# Altium PCB Kasli_BP_Adapter.PCBDOC (part 1 of 3)
Units mil, origin at the board's own origin, x right, y up, seen from the top; angles counter-clockwise.
Board outline 2027.63 x 3937 mil, 4 copper layers (TopLayer, MP(G), MidLayer1, BottomLayer), stack 64.961 mil thick; 18 components, 82 nets, 256 pads, 42 vias.
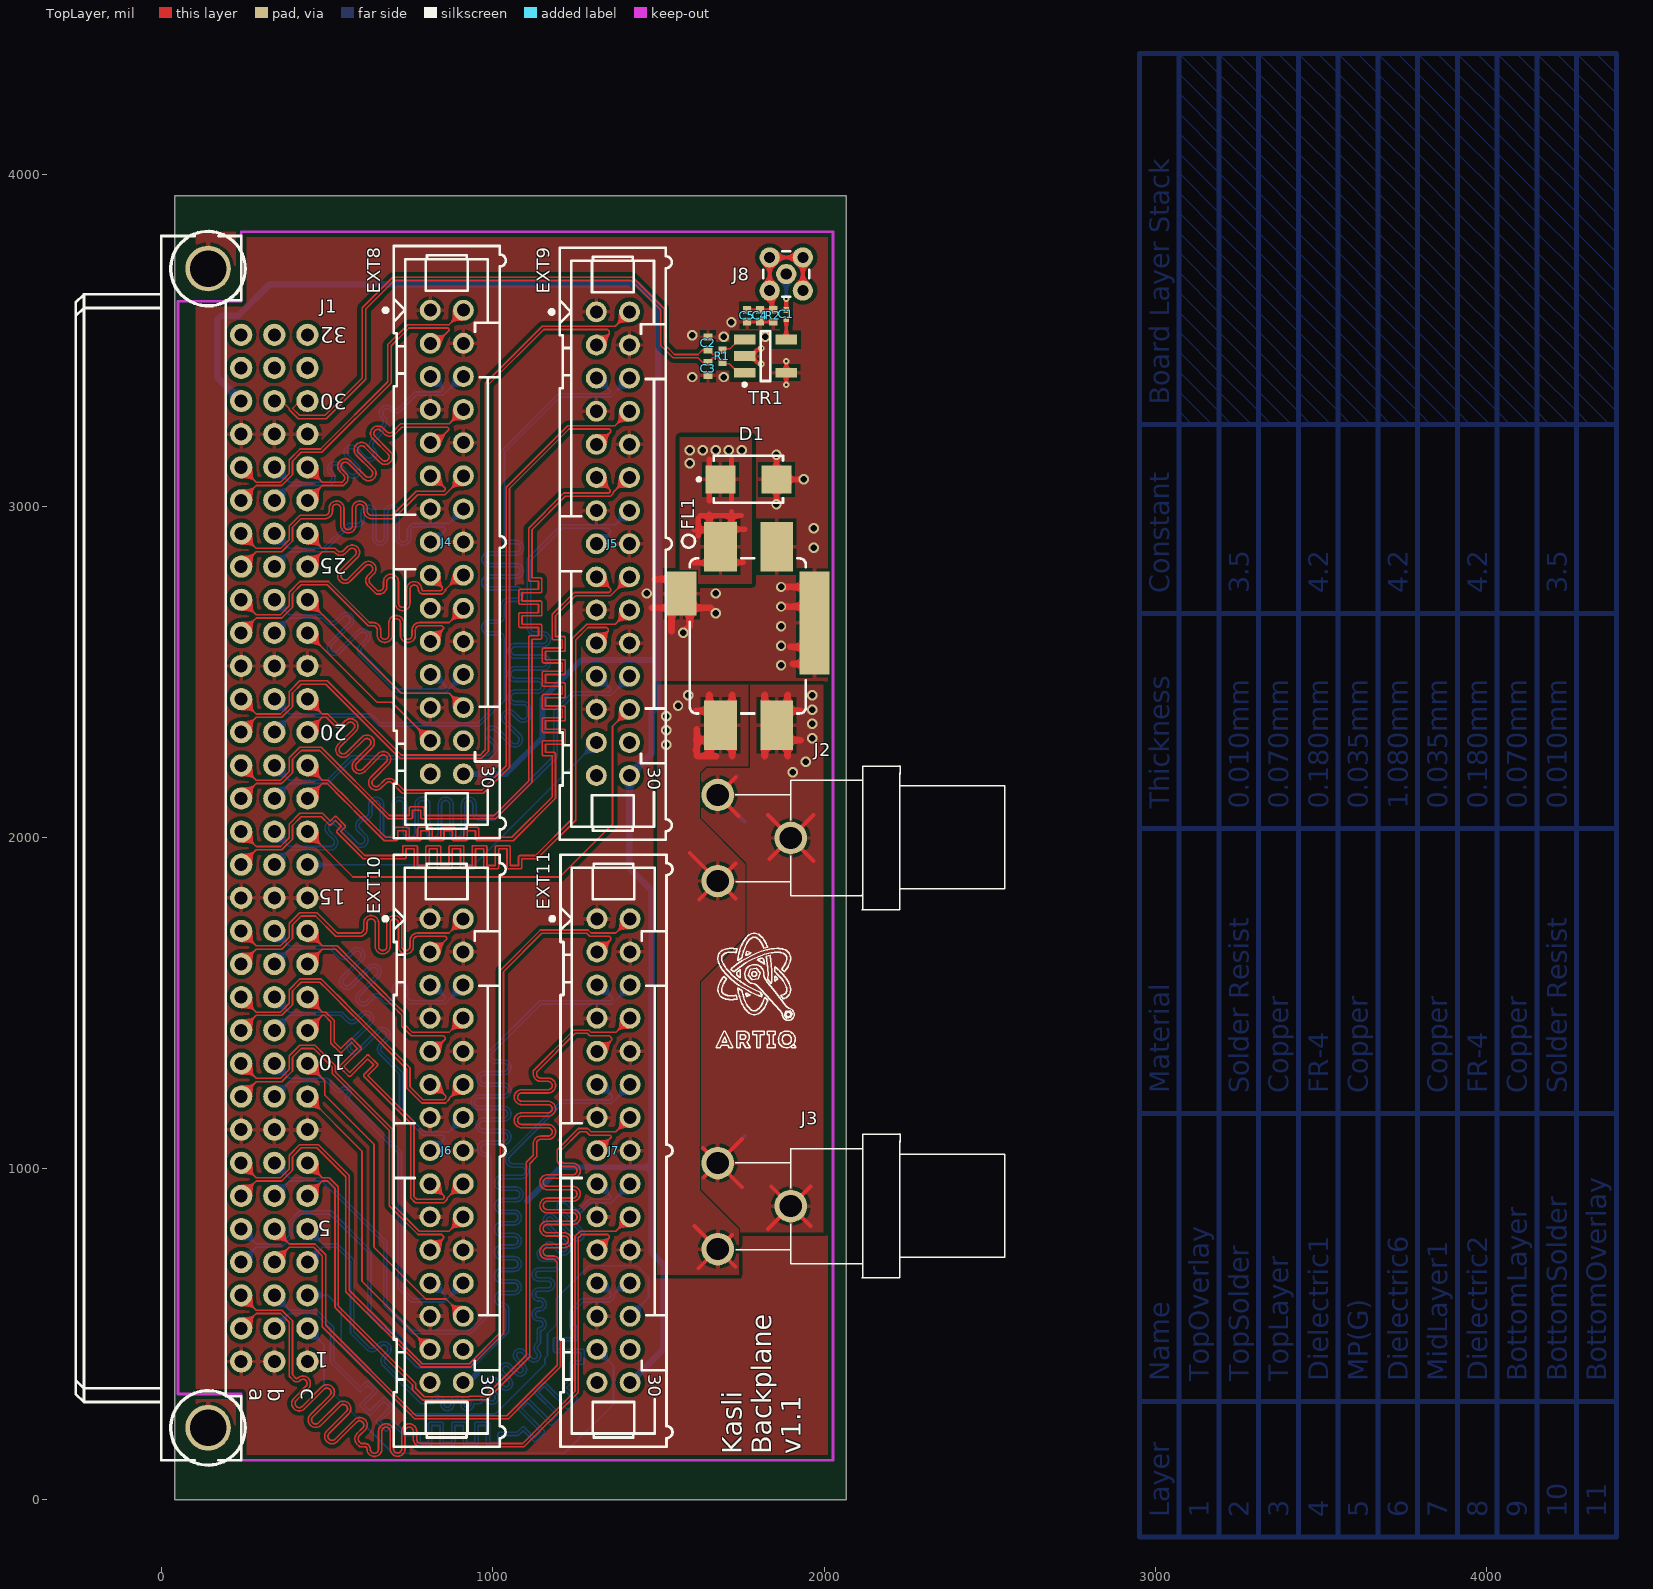
[diagram p0: TopLayer view]
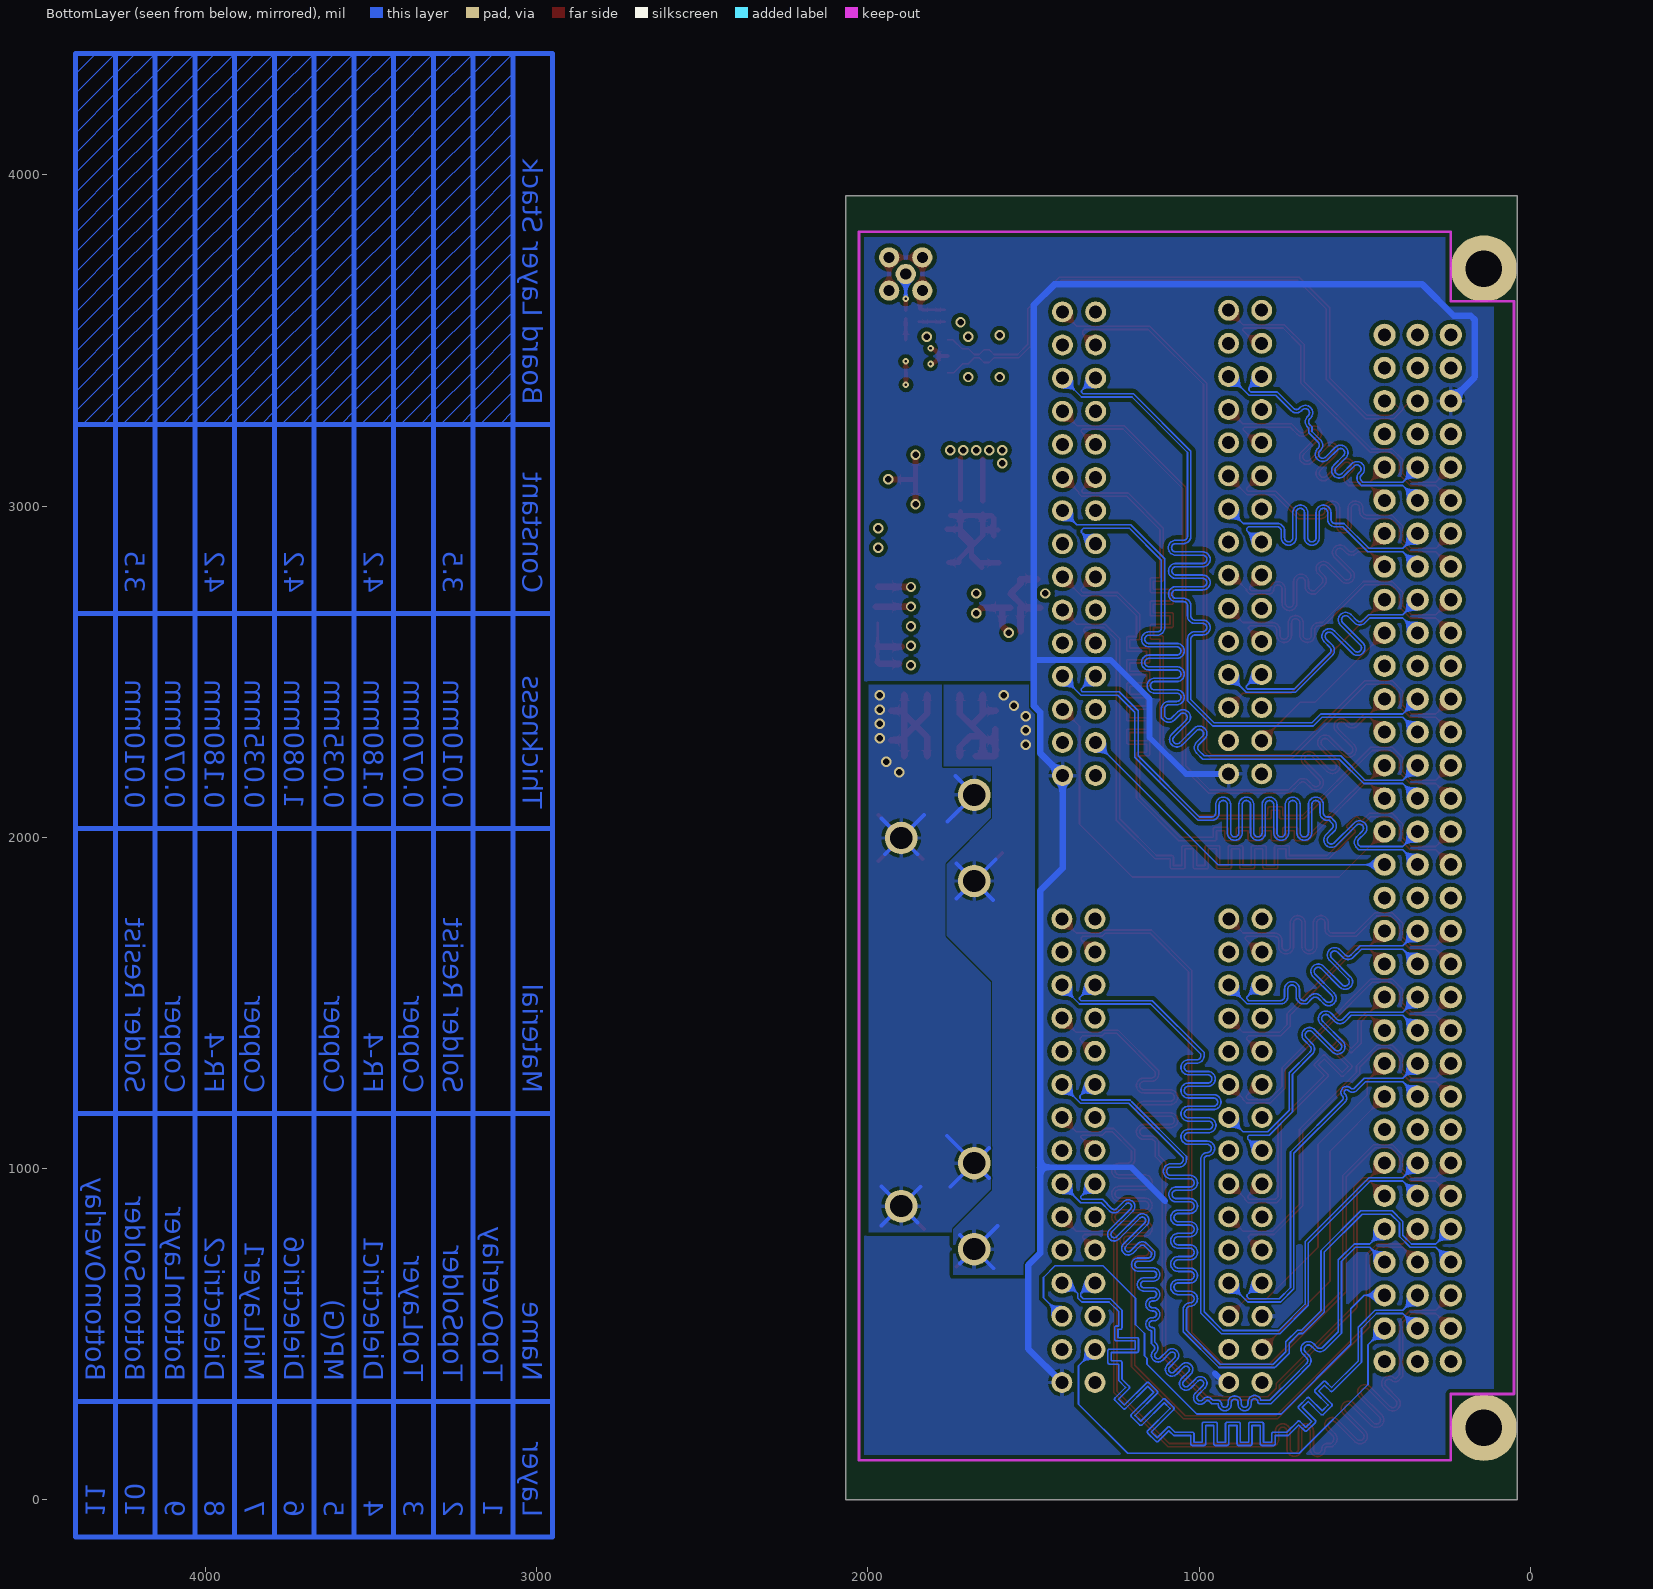
[diagram p1: BottomLayer view, seen from below]
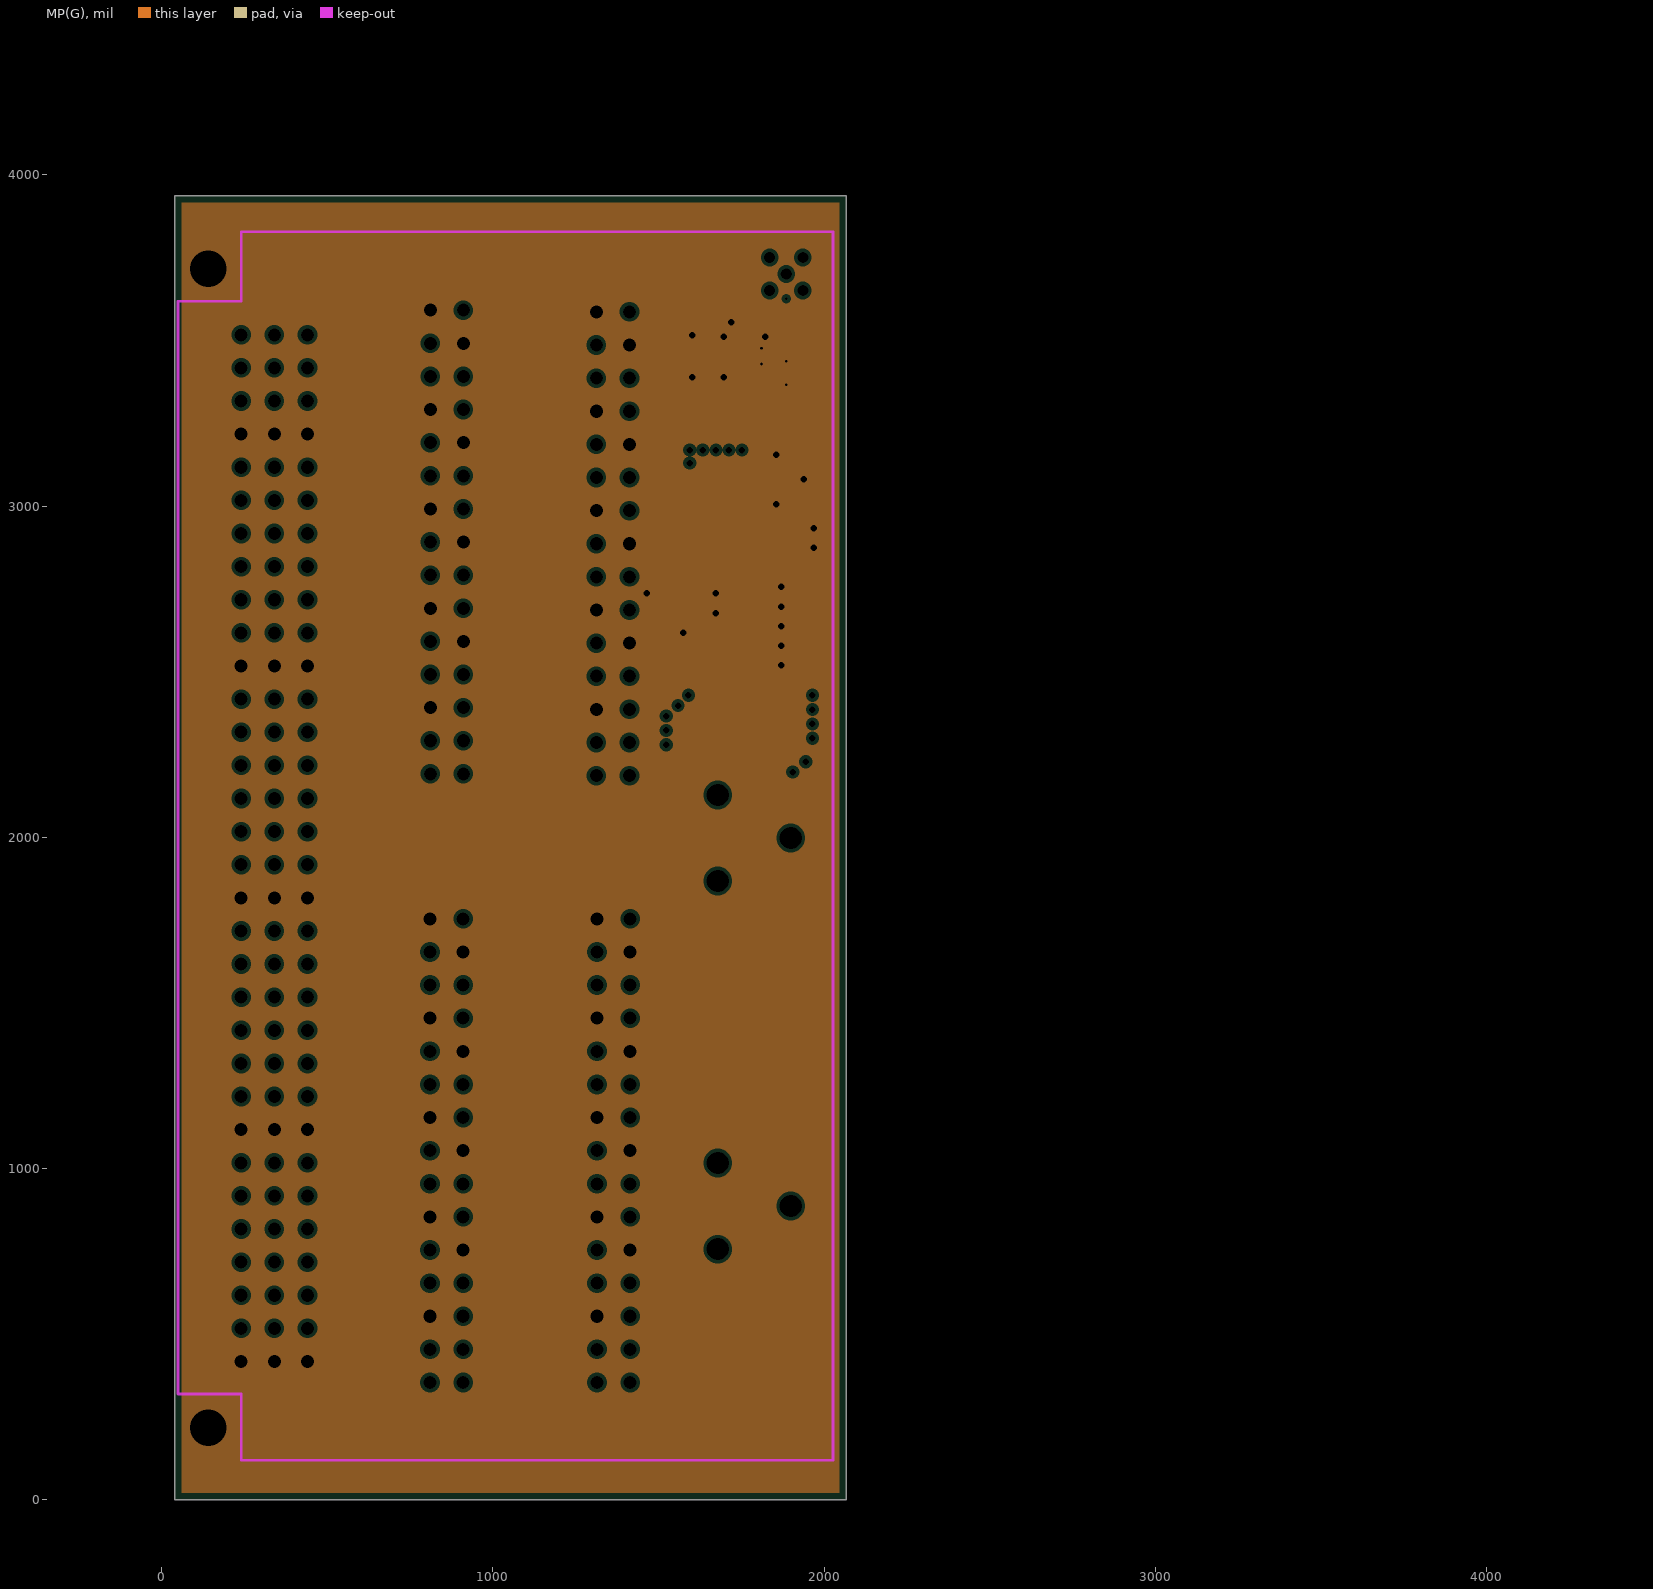
[diagram p2: MP(G), clearances drawn from the general rule]
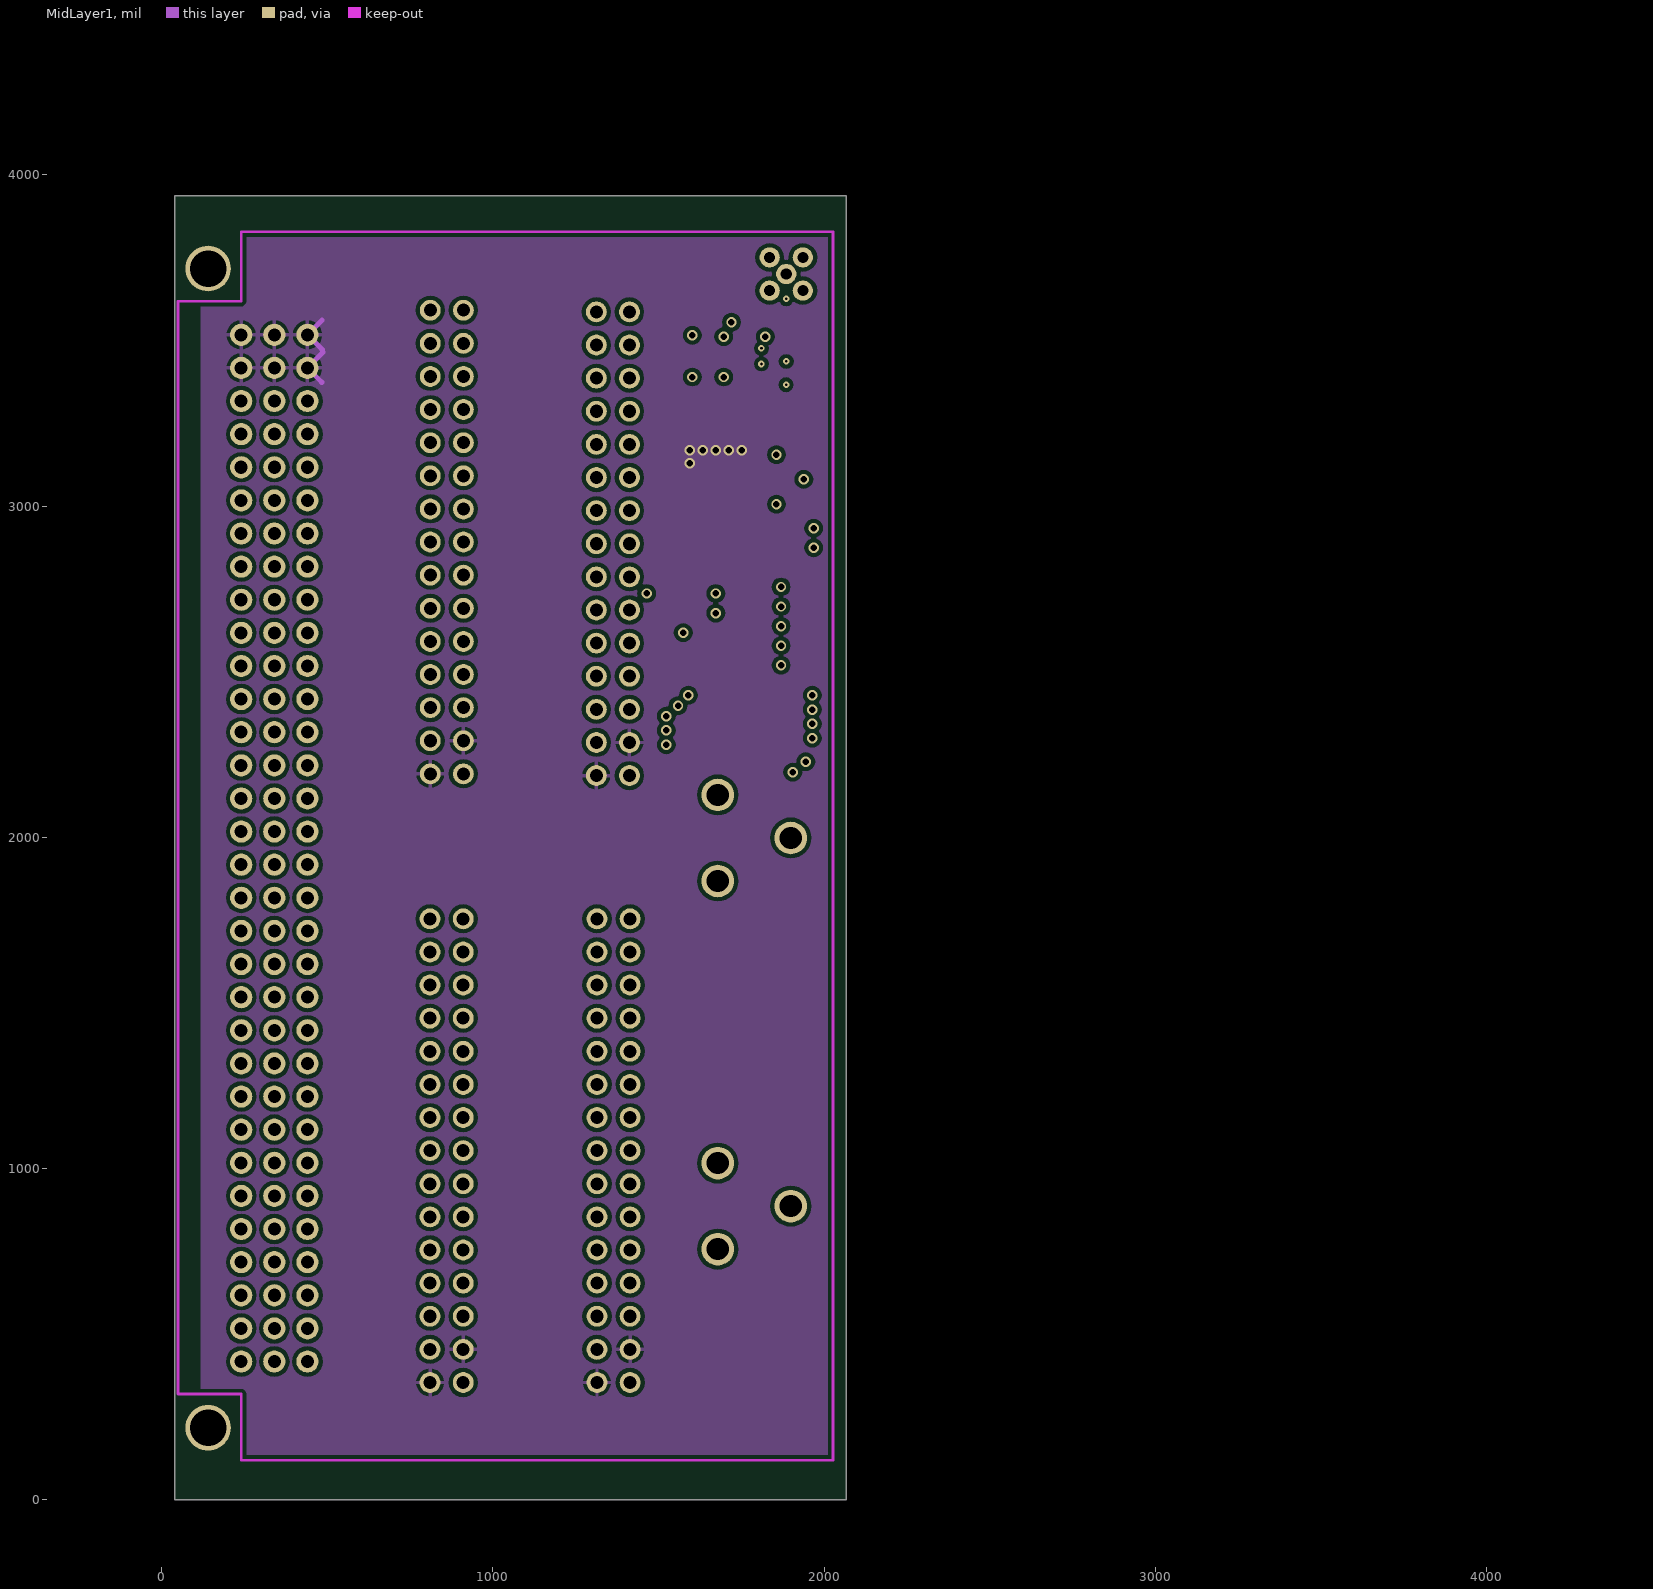
[diagram p3: MidLayer1]
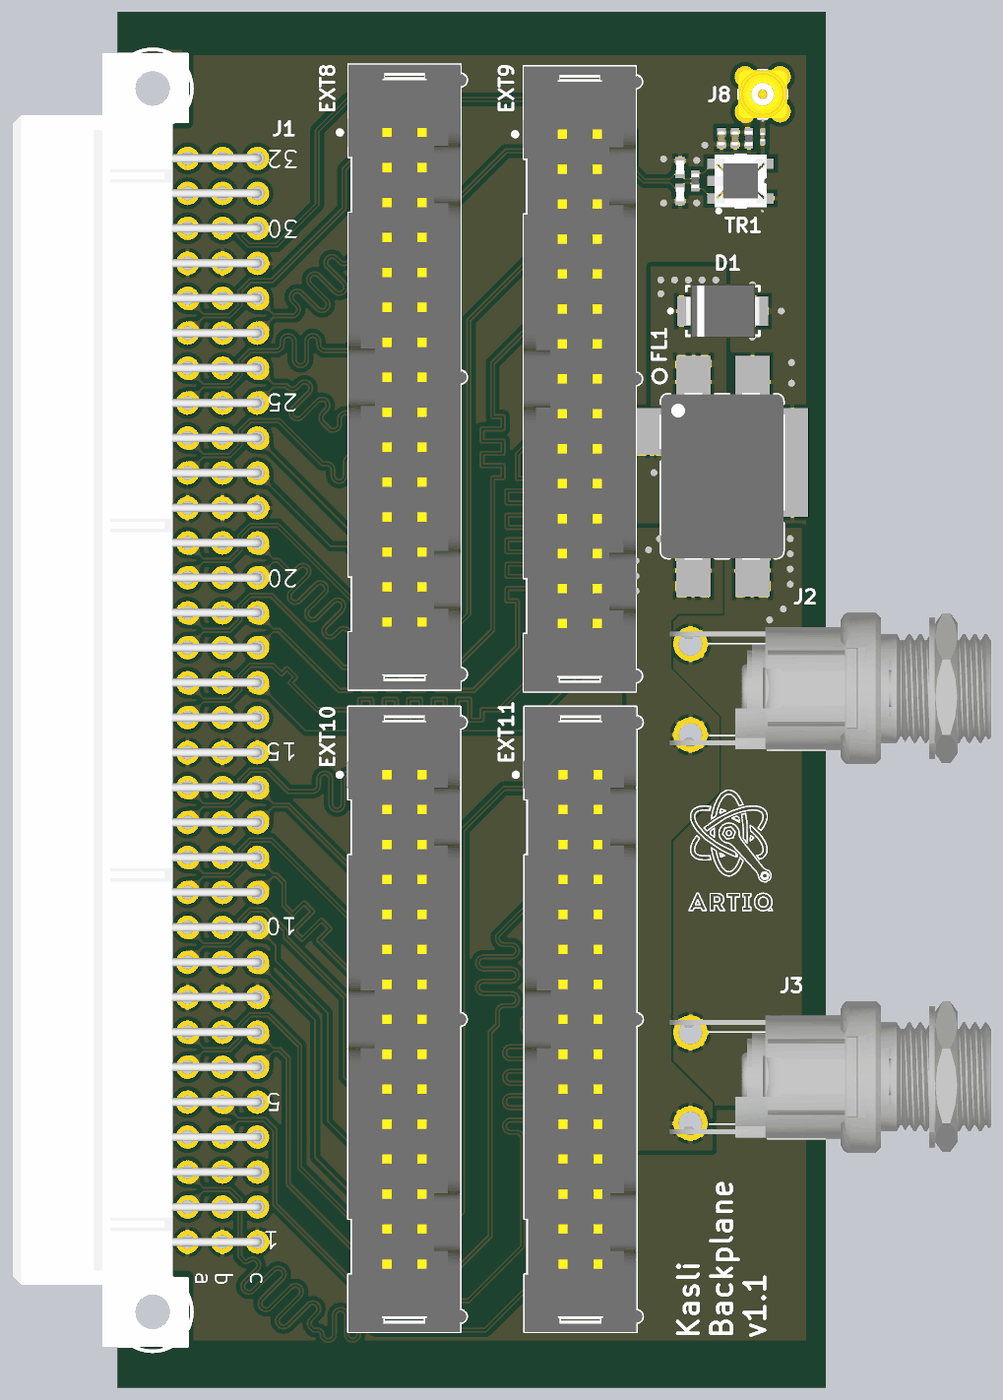
[diagram p5: 3D render of the assembled board from above, using the file's embedded part models]

## Layer stack, top to bottom
TopSolder: solder mask 0.4, Solder Resist, Dk 3.5
TopLayer: signal copper 2.7559
Dielectric1: prepreg 7.0866, FR-4, Dk 4.2
MP(G): plane copper 1.378, net GND
Dielectric6: core 42.5197, Dk 4.2
MidLayer1: signal copper 1.378
Dielectric2: prepreg 7.0866, FR-4, Dk 4.2
BottomLayer: signal copper 2.7559
BottomSolder: solder mask 0.4, Solder Resist, Dk 3.5

## Board outline
39.37,1913.39 39.37,3937 2067,3937 2067,0 39.37,0

## Design rules (kind name [scope] priority, off if disabled: settings)
AcuteAngle [All] p1: minimum=6.00000000000000E+0001 checktracksonly=FALSE
AssemblyTestPointUsage [All] p1 off:
AssemblyTestpoint [All] p1 off: testpointundercomponent=TRUE minsize=40 maxsize=100 preferedsize=60 minholesize=0 maxholesize=40 preferedholesize=32 testpointgrid=1 usegrid=TRUE gridtolerance=0.01 allowsidetop=TRUE allowsidebottom=TRUE
BoardOutlineClearance [All] p1: gap=15.75 ignorepadtopadclearanceinfootprint=FALSE
Clearance Clearance_poly_balancing [InNamedPolygon('BAL_TOP') or InNamedPolygon('BAL_BOT') or InNamedPolygon('ML1_BAL') or  InNamedPolygon('ML2_BAL')   or InNamedPolygon('GND_L01_P023') or InNamedPolygon('P12V0_L03_P024')  or InNamedPolygon('P3V3_L04_P028')] p1: gap=12 ignorepadtopadclearanceinfootprint=FALSE
Clearance Clearance_via [IsVia vs IsVia] p2: gap=5 ignorepadtopadclearanceinfootprint=FALSE
Clearance Clearance_inner [(OnLayer('MidLayer1') OR OnLayer('MidLayer2') OR OnLayer('SignalLayer1'))] p3: gap=5 ignorepadtopadclearanceinfootprint=FALSE
Clearance [OnLayer('TopLayer') or OnLayer('BottomLayer')] p4: gap=5 ignorepadtopadclearanceinfootprint=FALSE
ComponentClearance [All] p1 off: gap=10 collisioncheckmode=3 verticalgap=10 showdistances=FALSE
DiffPairsRouting DiffPairsRouting_100_Ohm [InDifferentialPairClass('Diff_100Ohm')] p1: maxlimit=9.84 minlimit=5 mostfreqgap=9.84 toplayer_maxgap=5 toplayer_prefgap=5 toplayer_minwidth=5 toplayer_maxwidth=5 toplayer_prefwidth=5 midlayer1_mingap=9.84 midlayer1_minwidth=5.91 midlayer1_maxwidth=5.91 midlayer1_prefwidth=5.91 bottomlayer_maxgap=5 bottomlayer_prefgap=5 bottomlayer_minwidth=5 bottomlayer_maxwidth=5 bottomlayer_prefwidth=5 maxuncoupledlength=393.7
DiffPairsRouting DiffPairsRouting_lvpecl [InDifferentialPairClass('LVPECL')] p2: maxlimit=9.84 minlimit=5 mostfreqgap=9.84 toplayer_maxgap=5 toplayer_prefgap=5 toplayer_minwidth=5 toplayer_maxwidth=5 toplayer_prefwidth=5 midlayer1_mingap=9.84 midlayer1_minwidth=5.91 midlayer1_maxwidth=5.91 midlayer1_prefwidth=5.91 bottomlayer_maxgap=5 bottomlayer_prefgap=5 bottomlayer_minwidth=5 bottomlayer_maxwidth=5 bottomlayer_prefwidth=5 maxuncoupledlength=393.7
DiffPairsRouting DiffPairsRouting_90_Ohm [InDifferentialPairClass('Diff_90Ohm')] p3: maxlimit=5.91 minlimit=4.92 mostfreqgap=5.91 toplayer_mingap=5.91 toplayer_minwidth=5.32 toplayer_maxwidth=5.32 toplayer_prefwidth=5.32 midlayer1_maxgap=4.92 midlayer1_prefgap=4.92 midlayer1_minwidth=12.28 midlayer1_maxwidth=12.28 midlayer1_prefwidth=12.28 bottomlayer_mingap=5.91 bottomlayer_minwidth=5.32 bottomlayer_maxwidth=5.32 bottomlayer_prefwidth=5.32 maxuncoupledlength=500
DiffPairsRouting [All] p4 off: maxlimit=10 minlimit=4.72 mostfreqgap=4.92 toplayer_minwidth=2.95 toplayer_maxwidth=19.68 toplayer_prefwidth=4.92 midlayer1_minwidth=2.95 midlayer1_maxwidth=19.68 midlayer1_prefwidth=4.92 bottomlayer_minwidth=2.95 bottomlayer_maxwidth=19.68 bottomlayer_prefwidth=4.92 maxuncoupledlength=118.11
FabricationTestPointUsage TestPointUsage [All] p1: valid=0 allowmultiple=FALSE
FabricationTestpoint Testpoint [All] p1: side=3 testpointundercomponent=TRUE minsize=40 maxsize=100 preferedsize=60 minholesize=20 maxholesize=40 preferedholesize=32 testpointgrid=1 allowsidetop=TRUE allowsidebottom=TRUE usegrid=TRUE gridtolerance=0.01
Height Height_1 [OnLayer('BottomLayer')] p1: minheight=0 maxheight=78.74 prefheight=39.37
Height [All] p2: minheight=0 maxheight=1000 prefheight=500
HoleSize [All] p1: absolutevalues=TRUE maxlimit=125.98 minlimit=5.91 maxpercent=80.000 minpercent=20.000
HoleToHoleClearance [All] p1: gap=5.91 allowstackedmicrovias=TRUE
MatchedLengths MatchedLengths_sfp [InDifferentialPairClass('SFP_RX_TX')] p1: tolerance=39.37 checknetsindiffpair=TRUE checkdiffpairvsdiffpair=FALSE checkxsignals=FALSE checkothers=FALSE
MatchedLengths MatchedLengths_diff_clocks [InxSignalClass('Differential clocks')] p2: tolerance=39.37 checknetsindiffpair=TRUE checkdiffpairvsdiffpair=FALSE checkxsignals=FALSE checkothers=FALSE
MatchedLengths MatchLengths_xSignals_clock_fanout [InxSignalClass('Clock fanout')] p3: tolerance=39.37 checknetsindiffpair=FALSE checkdiffpairvsdiffpair=TRUE checkxsignals=TRUE checkothers=TRUE
MatchedLengths MatchedLengths_ext11 [InDifferentialPairClass('EXT11')] p4: tolerance=39.37 checknetsindiffpair=FALSE checkdiffpairvsdiffpair=TRUE checkxsignals=TRUE checkothers=TRUE
MatchedLengths MatchedLengths_ext10 [InDifferentialPairClass('EXT10')] p5: tolerance=39.37 checknetsindiffpair=FALSE checkdiffpairvsdiffpair=TRUE checkxsignals=TRUE checkothers=TRUE
MatchedLengths MatchedLengths_ext9 [InDifferentialPairClass('EXT9')] p6: tolerance=39.37 checknetsindiffpair=FALSE checkdiffpairvsdiffpair=TRUE checkxsignals=TRUE checkothers=TRUE
MatchedLengths MatchedLengths_ext8 [InDifferentialPairClass('EXT8')] p7: tolerance=39.37 checknetsindiffpair=FALSE checkdiffpairvsdiffpair=TRUE checkxsignals=TRUE checkothers=TRUE
MatchedLengths [InDifferentialPairClass('All Differential Pairs')] p8: tolerance=196.85 checknetsindiffpair=TRUE checkdiffpairvsdiffpair=FALSE checkxsignals=FALSE checkothers=FALSE
MinimumAnnularRing MinimumAnnularRing_mid [OnLayer('MidLayer1') or OnLayer('MidLayer2') or OnLayer('MidLayer3') or OnLayer('MidLayer4')] p1: minimumring=5.91
MinimumAnnularRing MinimumAnnularRing_outer [OnLayer('TopLayer') or OnLayer('BottomLayer')] p2: minimumring=1.97
MinimumSolderMaskSliver [All] p1: minsoldermaskwidth=2.95
ParallelSegment [All] p1 off: limit=196.85 gap=10
PlaneClearance [All] p1: clearance=10
PlaneConnect [All] p1: pad.planeconnectstyle=Relief pad.reliefexpansion=7.87 pad.reliefentries=4 pad.reliefconductorwidth=10 pad.reliefairgap=10 via.planeconnectstyle=Direct via.reliefexpansion=7.87 via.reliefentries=4 via.reliefconductorwidth=10 via.reliefairgap=5.91
PolygonConnect PolygonConnect_pad [IsPad] p1: connectstyle=Relief reliefconductorwidth=11.81 reliefentries=4 polygonreliefangle="90 Angle" airgapwidth=10
PolygonConnect [All] p2: connectstyle=Direct reliefconductorwidth=10 reliefentries=4 polygonreliefangle="45 Angle" airgapwidth=10
RoomDefinition Connectors [InComponentClass('Connectors')] p1: confinementstyle=ConfineIn formatcopy=TRUE lockcomponents=FALSE outline -4000,-6000 -2000,-6000 -2000,-5000 -4000,-5000
RoomDefinition Kasli_BP_Adapter [InComponentClass('Kasli_BP_Adapter')] p2 off: confinementstyle=ConfineIn formatcopy=TRUE lockcomponents=FALSE outline 2093.19,392.06 2093.19,2207.94 2491.94,2207.94 2491.94,1927.94 5771.93,1927.94 5771.93,112.06 2561.76,112.06 2561.76,392.06
RoutingLayers RoutingLayers_1 [InNetClass('Diff_100Ohm')] p1: top layer_v5=TRUE mid layer 1_v5=FALSE bottom layer_v5=TRUE
RoutingLayers [All] p2: top layer_v5=TRUE mid layer 1_v5=TRUE bottom layer_v5=TRUE
RoutingTopology RoutingTopology_DDRAddressAndControls [InNetClass('DDR_AddressAndControls')] p1: topology=Daisy_Simple
RoutingTopology [All] p2: topology=Shortest
RoutingVias [All] p1: holewidth=5.91 width=13.78 viastyle="Through Hole" minholewidth=5.91 minwidth=13.78 maxholewidth=23.62 maxwidth=31.5
SMDEntry [All] p1 off: side=TRUE corner=TRUE anyangle=FALSE
SilkToSilkClearance [All] p1: silktosilkclearance=0
SilkToSolderMaskClearance SilkscreenOverComponentPads [IsPad] p1: minsilkscreentomaskgap=0 clearancetoexposedcopper=FALSE
SolderMaskExpansion [All] p1: expansion=1.97
StubLength [All] p1: limit=118.11
UnConnectedPin [All] p1 off:
ViasUnderSMD ViasUnderSMD_1 [(InNet('GND') AND (InComponent('IC1') or InComponent('IC2') or InComponent('IC3') or InComponent('IC14') or InComponent('IC15') or InComponent('IC18')))] p1: allowed=TRUE
ViasUnderSMD [All] p2: allowed=FALSE
Width Width_50Ohm [InNetClass('50Ohm')] p1: maxlimit=39.37 minlimit=11.81 preferedwidth=25.59 toplayer_maxwidth=11.81 toplayer_prefwidth=11.81 bottomlayer_maxwidth=11.81 bottomlayer_prefwidth=11.81 minimp=50.000000 maximp=50.000000 favimp=50.000000
Width [All] p2: maxlimit=78.74 minlimit=5 preferedwidth=5 minimp=50.000000 maximp=50.000000 favimp=50.000000
14 further rules are at their usual default settings.

## Classes and differential pairs
differential pair class EXT11: EXT11.LVDS_0 EXT11.LVDS_1 EXT11.LVDS_2 EXT11.LVDS_3 EXT11.LVDS_4 EXT11.LVDS_5 EXT11.LVDS_6 EXT11.LVDS_7
differential pair class EXT10: EXT10.LVDS_0 EXT10.LVDS_1 EXT10.LVDS_2 EXT10.LVDS_3 EXT10.LVDS_4 EXT10.LVDS_5 EXT10.LVDS_6 EXT10.LVDS_7
differential pair class EXT9: EXT9.LVDS_0 EXT9.LVDS_1 EXT9.LVDS_2 EXT9.LVDS_3 EXT9.LVDS_4 EXT9.LVDS_5 EXT9.LVDS_6 EXT9.LVDS_7
differential pair class EXT8: EXT8.LVDS_0 EXT8.LVDS_1 EXT8.LVDS_2 EXT8.LVDS_3 EXT8.LVDS_4 EXT8.LVDS_5 EXT8.LVDS_6 EXT8.LVDS_7
differential pair class LVPECL: CLK_EXT
differential pair class Diff_100Ohm: EXT8.LVDS_0 EXT8.LVDS_1 EXT8.LVDS_2 EXT8.LVDS_3 EXT8.LVDS_4 EXT8.LVDS_5 EXT8.LVDS_6 EXT8.LVDS_7 EXT9.LVDS_0 EXT9.LVDS_1 EXT9.LVDS_2 EXT9.LVDS_3 EXT9.LVDS_4 EXT9.LVDS_5 EXT9.LVDS_6 EXT9.LVDS_7 EXT10.LVDS_0 EXT10.LVDS_1 EXT10.LVDS_2 EXT10.LVDS_3 EXT10.LVDS_4 EXT10.LVDS_5 EXT10.LVDS_6 EXT10.LVDS_7 EXT11.LVDS_0 EXT11.LVDS_1 EXT11.LVDS_2 EXT11.LVDS_3 EXT11.LVDS_4 EXT11.LVDS_5 EXT11.LVDS_6 EXT11.LVDS_7
net class LVPECL: CLK_EXT_N CLK_EXT_P
net class Diff_100Ohm: EXT8.LVDS_0_N EXT8.LVDS_0_P EXT8.LVDS_1_N EXT8.LVDS_1_P EXT8.LVDS_2_N EXT8.LVDS_2_P EXT8.LVDS_3_N EXT8.LVDS_3_P EXT8.LVDS_4_N EXT8.LVDS_4_P EXT8.LVDS_5_N EXT8.LVDS_5_P EXT8.LVDS_6_N EXT8.LVDS_6_P EXT8.LVDS_7_N EXT8.LVDS_7_P EXT9.LVDS_0_N EXT9.LVDS_0_P EXT9.LVDS_1_N EXT9.LVDS_1_P EXT9.LVDS_2_N EXT9.LVDS_2_P EXT9.LVDS_3_N EXT9.LVDS_3_P EXT9.LVDS_4_N EXT9.LVDS_4_P EXT9.LVDS_5_N EXT9.LVDS_5_P EXT9.LVDS_6_N EXT9.LVDS_6_P EXT9.LVDS_7_N EXT9.LVDS_7_P EXT10.LVDS_0_N EXT10.LVDS_0_P EXT10.LVDS_1_N EXT10.LVDS_1_P EXT10.LVDS_2_N EXT10.LVDS_2_P EXT10.LVDS_3_N EXT10.LVDS_3_P EXT10.LVDS_4_N EXT10.LVDS_4_P EXT10.LVDS_5_N EXT10.LVDS_5_P EXT10.LVDS_6_N EXT10.LVDS_6_P EXT10.LVDS_7_N EXT10.LVDS_7_P EXT11.LVDS_0_N EXT11.LVDS_0_P EXT11.LVDS_1_N EXT11.LVDS_1_P EXT11.LVDS_2_N EXT11.LVDS_2_P EXT11.LVDS_3_N EXT11.LVDS_3_P EXT11.LVDS_4_N EXT11.LVDS_4_P EXT11.LVDS_5_N EXT11.LVDS_5_P EXT11.LVDS_6_N EXT11.LVDS_6_P EXT11.LVDS_7_N EXT11.LVDS_7_P
net class I2C_SDA_[11..8]: I2C_SDA_8 I2C_SDA_9 I2C_SDA_10 I2C_SDA_11
net class I2C_SCL_[11..8]: I2C_SCL_8 I2C_SCL_9 I2C_SCL_10 I2C_SCL_11
net class 50Ohm: NetC1_1 NetC1_2
component class Connectors: J2 J3
differential pair EXT11.LVDS_7: +EXT11.LVDS_7_P -EXT11.LVDS_7_N
differential pair EXT11.LVDS_6: +EXT11.LVDS_6_P -EXT11.LVDS_6_N
differential pair EXT11.LVDS_5: +EXT11.LVDS_5_P -EXT11.LVDS_5_N
differential pair EXT11.LVDS_4: +EXT11.LVDS_4_P -EXT11.LVDS_4_N
differential pair EXT11.LVDS_3: +EXT11.LVDS_3_P -EXT11.LVDS_3_N
differential pair EXT11.LVDS_2: +EXT11.LVDS_2_P -EXT11.LVDS_2_N
differential pair EXT11.LVDS_1: +EXT11.LVDS_1_P -EXT11.LVDS_1_N
differential pair EXT11.LVDS_0: +EXT11.LVDS_0_P -EXT11.LVDS_0_N
differential pair EXT10.LVDS_7: +EXT10.LVDS_7_P -EXT10.LVDS_7_N
differential pair EXT10.LVDS_6: +EXT10.LVDS_6_P -EXT10.LVDS_6_N
differential pair EXT10.LVDS_5: +EXT10.LVDS_5_P -EXT10.LVDS_5_N
differential pair EXT10.LVDS_4: +EXT10.LVDS_4_P -EXT10.LVDS_4_N
differential pair EXT10.LVDS_3: +EXT10.LVDS_3_P -EXT10.LVDS_3_N
differential pair EXT10.LVDS_2: +EXT10.LVDS_2_P -EXT10.LVDS_2_N
differential pair EXT10.LVDS_1: +EXT10.LVDS_1_P -EXT10.LVDS_1_N
differential pair EXT10.LVDS_0: +EXT10.LVDS_0_P -EXT10.LVDS_0_N
differential pair EXT9.LVDS_7: +EXT9.LVDS_7_P -EXT9.LVDS_7_N
differential pair EXT9.LVDS_6: +EXT9.LVDS_6_P -EXT9.LVDS_6_N
differential pair EXT9.LVDS_5: +EXT9.LVDS_5_P -EXT9.LVDS_5_N
differential pair EXT9.LVDS_4: +EXT9.LVDS_4_P -EXT9.LVDS_4_N
differential pair EXT9.LVDS_3: +EXT9.LVDS_3_P -EXT9.LVDS_3_N
differential pair EXT9.LVDS_2: +EXT9.LVDS_2_P -EXT9.LVDS_2_N
differential pair EXT9.LVDS_1: +EXT9.LVDS_1_P -EXT9.LVDS_1_N
differential pair EXT9.LVDS_0: +EXT9.LVDS_0_P -EXT9.LVDS_0_N
differential pair EXT8.LVDS_7: +EXT8.LVDS_7_P -EXT8.LVDS_7_N
differential pair EXT8.LVDS_6: +EXT8.LVDS_6_P -EXT8.LVDS_6_N
differential pair EXT8.LVDS_5: +EXT8.LVDS_5_P -EXT8.LVDS_5_N
differential pair EXT8.LVDS_4: +EXT8.LVDS_4_P -EXT8.LVDS_4_N
differential pair EXT8.LVDS_3: +EXT8.LVDS_3_P -EXT8.LVDS_3_N
differential pair EXT8.LVDS_2: +EXT8.LVDS_2_P -EXT8.LVDS_2_N
differential pair EXT8.LVDS_1: +EXT8.LVDS_1_P -EXT8.LVDS_1_N
differential pair EXT8.LVDS_0: +EXT8.LVDS_0_P -EXT8.LVDS_0_N
differential pair CLK_EXT: +CLK_EXT_P -CLK_EXT_N

## Components (designator, comment, footprint, x,y, rotation, side; value= is the part's Value field where it differs from the comment)
C1 "100nF" CAPC0603X33N 1885.83,3578.74 r90 top
C2 "0.5pF" CAPC1005X50N 1649.61,3491.14 r270 top
C3 "0.5pF" CAPC1005X50N 1649.61,3414.37 r270 top
C4 "10nF" CAPC1005X55N 1807.09,3574.8 r90 top
C5 "10nF" CAPC1005X55N 1767.72,3574.8 r90 top
D1 "SMBJ12A" DIOM5336X265N 1771.65,3080.71 r0 top
FL1 "10A/50VDC" FIL_MURATA_BNX02 1770,2608 r90 top
J1 "DIN 41612 Type R" "HARTING_09 73 296 6801" 240.16,417.32 r180 top locked
J2 "Jack" SWITCHCRAFT_L712RA 1679.13,1868.11 r180 top locked
J3 "Jack" SWITCHCRAFT_L712RA 1679.13,756.56 r180 top locked
J4 "=Familly" 3M_N2530-6002RB 861.02,2891.53 r270 top locked
J5 "=Familly" 3M_N2530-6002RB 1362.4,2886.42 r270 top locked
J6 "=Familly" 3M_N2530-6002RB 860.43,1053.94 r270 top locked
J7 "=Familly" 3M_N2530-6002RB 1364.37,1053.94 r270 top locked
J8 "MMCX-J-P-H-ST-TH1" SAMTEC_MMCX-J-P-H-ST-TH1 1885.82,3700.79 r0 top
R1 "100" RESC1005X40N 1692.91,3452.76 r90 top
R2 "100k" RESC1005X40N 1846.46,3574.8 r90 top
TR1 "TC2-1TX+" XFMR_MINI-CIRCUITS_AT1521 1822.83,3452.76 r90 top

## Footprints (in the part's own frame and the unit in brackets; to place one, negate y for a bottom-side part, rotate by r counter-clockwise, add the part's x,y. Pads: shape width x height; smd on the part's side, far side on the other; paste and mask are expansions set on the pad)
3M_N2530-6002RB [mm] "30 Contacts - Straight .100\" x .100\" Low Profile Four-Wall Header"
  round 1.6 hole 1: 1(-17.78,-1.27) 2(-17.78,1.27) 3(-15.24,-1.27) 4(-15.24,1.27) 5(-12.7,-1.27) 6(-12.7,1.27) 7(-10.16,-1.27) 8(-10.16,1.27) 9(-7.62,-1.27) 10(-7.62,1.27) 11(-5.08,-1.27) 12(-5.08,1.27) 13(-2.54,-1.27) 14(-2.54,1.27) 15(0,-1.27) 16(0,1.27) 17(2.54,-1.27) 18(2.54,1.27) 19(5.08,-1.27) 20(5.08,1.27) 21(7.62,-1.27) 22(7.62,1.27) 23(10.16,-1.27) 24(10.16,1.27) 25(12.7,-1.27) 26(12.7,1.27) 27(15.24,-1.27) 28(15.24,1.27) 29(17.78,-1.27) 30(17.78,1.27)
  silkscreen extent -22.71,-4.85 22.71,4.52, body extent -22.71,-4.11 22.71,4.52, height 9.91
CAPC0603X33N [mm] "Chip Capacitor, Body 0.6x0.30mm, IPC Medium Density"
  rect 0.45x0.4 smd: 1(-0.35,0) 2(0.35,0)
  body extent -0.31,-0.16 0.32,0.17, height 0.33
CAPC1005X50N [mm] "Chip Capacitor, Body 1.0x0.55mm, IPC Medium Density"
  rect 0.57x0.68 smd: 1(-0.49,0) 2(0.49,0)
  body extent -0.5,-0.27 0.5,0.28, height 0.5
CAPC1005X55N [mm] "Chip Capacitor, Body 1.0x0.55mm, IPC Medium Density"
  rect 0.62x0.62 smd: 1(-0.45,0) 2(0.45,0)
  body extent -0.52,-0.27 0.53,0.28, height 0.55
DIOM5336X265N [mm] "DO-214-AA/SMB Diode, Molded Body; 5.34mm L X 3.625mm W X 2.65mm H, IPC Medium Density"
  rect 2.3x2.15 smd: 1(-2.15,0) 2(2.15,0)
  silkscreen extent -3.92,-1.8 2.65,1.8, body extent -2.7,-1.95 2.7,1.95, height 2.4
FIL_MURATA_BNX02 [mm] "Block Type EMIFIL LC Combined Type, BNX02* Series"
  rect 3.8x2.5 smd: 1(-6.85,2.1) 2(6.85,2.1) 3(-6.85,-2.2) 4(6.85,-2.2)
  rect 7.9x2.3 smd: 4(1,-5.1)
  rect 3.4x2.3 smd: 4(3.25,5.1)
  silkscreen extent -5.95,-4.45 7.77,5.05, body extent -6.05,-4.55 6.05,4.55, height 3.1
"HARTING_09 73 296 6801" [mm] "Connector; DIN 41612, Type R, Thru-Hole; Rows a+b+c, 96 Position; Right Angle"
  round 1.7 hole 1: a1(0,0) a2(0,-2.54) a3(0,-5.08) a4(0,-7.62) a5(0,-10.16) a6(0,-12.7) a7(0,-15.24) a8(0,-17.78) a9(0,-20.32) a10(0,-22.86) a11(0,-25.4) a12(0,-27.94) a13(0,-30.48) a14(0,-33.02) a15(0,-35.56) a16(0,-38.1) a17(0,-40.64) a18(0,-43.18) a19(0,-45.72) a20(0,-48.26) a21(0,-50.8) a22(0,-53.34) a23(0,-55.88) a24(0,-58.42) a25(0,-60.96) a26(0,-63.5) a27(0,-66.04) a28(0,-68.58) a29(0,-71.12) a30(0,-73.66) a31(0,-76.2) a32(0,-78.74) b1(-2.54,0) b2(-2.54,-2.54) b3(-2.54,-5.08) b4(-2.54,-7.62) b5(-2.54,-10.16) b6(-2.54,-12.7) b7(-2.54,-15.24) b8(-2.54,-17.78) b9(-2.54,-20.32) b10(-2.54,-22.86) b11(-2.54,-25.4) b12(-2.54,-27.94) b13(-2.54,-30.48) b14(-2.54,-33.02) b15(-2.54,-35.56) b16(-2.54,-38.1) b17(-2.54,-40.64) b18(-2.54,-43.18) b19(-2.54,-45.72) b20(-2.54,-48.26) b21(-2.54,-50.8) b22(-2.54,-53.34) b23(-2.54,-55.88) b24(-2.54,-58.42) b25(-2.54,-60.96) b26(-2.54,-63.5) b27(-2.54,-66.04) b28(-2.54,-68.58) b29(-2.54,-71.12) b30(-2.54,-73.66) b31(-2.54,-76.2) b32(-2.54,-78.74) c1(-5.08,0) c2(-5.08,-2.54) c3(-5.08,-5.08) c4(-5.08,-7.62) c5(-5.08,-10.16) c6(-5.08,-12.7) c7(-5.08,-15.24) c8(-5.08,-17.78) c9(-5.08,-20.32) c10(-5.08,-22.86) c11(-5.08,-25.4) c12(-5.08,-27.94) c13(-5.08,-30.48) c14(-5.08,-33.02) c15(-5.08,-35.56) c16(-5.08,-38.1) c17(-5.08,-40.64) c18(-5.08,-43.18) c19(-5.08,-45.72) c20(-5.08,-48.26) c21(-5.08,-50.8) c22(-5.08,-53.34) c23(-5.08,-55.88) c24(-5.08,-58.42) c25(-5.08,-60.96) c26(-5.08,-63.5) c27(-5.08,-66.04) c28(-5.08,-68.58) c29(-5.08,-71.12) c30(-5.08,-73.66) c31(-5.08,-76.2) c32(-5.08,-78.74)
  round 3.5 / inner round 3.5 / far side round 5.1 hole 2.8: MTG1(2.54,5.08) MTG2(2.54,-83.82)
  silkscreen extent 0.01,-86.32 12.69,7.58, body extent -5.38,-86.37 12.74,7.63, height 9.1
RESC1005X40N [mm] "Chip Resistor, EIA 0402, Metric 1005, Body 1.0x0.5mm, IPC Medium Density"
  rect 0.58x0.62 smd: 1(-0.47,0) 2(0.47,0)
  body extent -0.52,-0.27 0.53,0.28, height 0.4
SAMTEC_MMCX-J-P-H-ST-TH1 [mm] "Straight Through-hole 50 Ohm Micro Mini RF Jack, MMCX Serie"
  round 1.55 hole 0.85: 1(0,0) 2(-1.27,-1.27) 2(-1.27,1.27) 2(1.27,-1.27) 2(1.27,1.27)
  silkscreen extent -1.75,-1.75 1.75,1.75, body extent -1.75,-1.75 1.75,1.75, height 4.35
SWITCHCRAFT_L712RA [mm] "CONN PWR JACK 2.5X5.5MM SOLDER"
  round 2.5 hole 1.7: 1(-5.6,-3.3) 2(0,-6.6) 3(0,0)
  silkscreen extent -22,-8.84 -1.32,2.21, body extent -21.84,-8.89 1.51,2.14, height 13.9
XFMR_MINI-CIRCUITS_AT1521 [mm] "MINI-CIRCUITS RF Transformer, Case AT1521, Body 3.81X3.81mm"
  rect 0.76x1.65 smd: 1(-1.27,1.59) 2(0,1.59) 3(1.27,1.59) 4(1.27,-1.59) 6(-1.27,-1.59)
  silkscreen extent -2.3,-0.37 1.9,1.72, body extent -1.9,-1.9 1.91,1.91, height 4.06

## Part data
C1: library part CC0201_100NF_6.3V_10%_X5R, "Non-polarised capacitor", Case=0201, Manufacturer=GENERIC, Manufacturer1 ComponentHeight=0.33mm, Manufacturer1 Example=AVX, Manufacturer1 Part Number=02016D104KAT2A, Tolerance=±10%, Voltage=6.3V, Author="CERN DEM JLC", Component Type=Standard, CreateDate=2007-12-03, HelpURL=\\cern.ch\dfs\Applications\Altium\Datasheets\CC0201_X5R_AVX.pdf, LatestRevisionDate=2007-12-03, Manufacturer Part Number=CC0201_100NF_6.3V_10%_X5R, Mounted=Yes, Part Description="SMD Multilayer Chip Ceramic Capacitor", Part Number=CC0201_100NF_6.3V_10%_X5R, Pin Count=2, Sense=No, SMD=Yes, Socket=No, Status="Not Recommended", TC=X5R
C2 C3: library part CC0402_0.5PF_25V_0.05PF_AVX_04023J0R5ABSTR, "Non-polarised capacitor", Case=0402, Manufacturer=AVX, Manufacturer Part Number=04023J0R5ABSTR, Tolerance=±0.05pF, Voltage=25V, Author="CERN DEM JLC", ComponentHeight=0.5mm, Component Type=Standard, CreateDate=2017-02-22, HelpURL=\\cern.ch\dfs\Applications\Altium\Datasheets\CC0402_AVX_ACCU-P.pdf, LatestRevisionDate=2017-02-22, Mounted=Yes, Part Description="Thin-Film Chip Capacitors for RF Signal and Power Applications, Accu-P Series", Part Number=CC0402_0.5PF_25V_0.05PF_AVX_04023J0R5ABSTR, Pin Count=2, Sense=No, SMD=Yes, Socket=No, Status=None
C4 C5: library part CC0402_10NF_16V_10%_X7R, "Non-polarised capacitor", Case=0402, Manufacturer=GENERIC, Manufacturer1 ComponentHeight=0.55mm, Manufacturer1 Example=PHYCOMP, Manufacturer1 Part Number=223878715636, Tolerance=±10%, Voltage=16V, Author="CERN DEM JLC", Component Type=Standard, CreateDate=03.12.2007, HelpURL=\\cern.ch\dfs\Applications\Altium\Datasheets\CC0402_X7R_PHYCOMP.pdf, LatestRevisionDate=03.12.2007, Manufacturer Part Number=CC0402_10NF_16V_10%_X7R, Mounted=Yes, Part Description="SMD Multilayer Chip Ceramic Capacitor", Part Number=CC0402_10NF_16V_10%_X7R, Pin Count=2, Sense=No, SMD=Yes, Socket=No, Status="Not Recommended", TC=X7R
D1: "Zener Diode", Case=DO-214AA, Manufacturer="FAIRCHILD SEMICONDUCTOR", Power=600W, Voltage=12V, Author="CERN DEM JLC", Bonding=No, ComponentHeight=2.65mm, Component Type=Standard, CreateDate=10.04.2013, Device=SMBJ12A, HelpURL=\\cern.ch\dfs\Applications\Altium\Datasheets\SMBJ.pdf, LatestRevisionDate=10.04.2013, Manufacturer Part Number=SMBJ12A, Mounted=Yes, PackageDescription="DO-214-AA/SMB Diode, Molded Body; 5.34mm L X 3.625mm W X 2.65mm H, IPC Medium Density", Part Description="Uni-Directional Transient Voltage Suppressor Diode", Part Number=SMBJ12A, Pin Count=2, PressFit=No, Sense=No, SMD=Yes, Socket=No
FL1: library part FIL_MURATA_BNX022-01L, "Block Type EMIFIL (LC Combined)", Manufacturer=MURATA, Manufacturer Part Number=BNX022-01L, Resistance=0.5R, Author="CERN DEM JLC", ComponentHeight=3.3mm, Component Type=Standard, CreateDate=10.10.2012, HelpURL=\\cern.ch\dfs\Applications\Altium\Datasheets\FIL_MURATA_BNX022-01L.pdf, LatestRevisionDate=10.10.2012, Mounted=Yes, Part Description="Block Type EMIFIL (LC Combined) SMD Type, BNX02* Series", Part Number=FIL_MURATA_BNX022-01L, Pin Count=2, Sense=No, SMD=Yes, Socket=No, Status=None
J1: library part "HARTING_09 73 296 6801", "Connector 96abc Female (3x32)", Manufacturer=HARTING, Manufacturer Part Number="09 73 296 6801", Author="CERN DEM JLC", ComponentHeight=9.5mm, Component Type=Standard, CreateDate=22.07.2008, Family="DIN 41612 Type R", HelpURL="\\cern.ch\dfs\Applications\Altium\Datasheets\HARTING_09 73 296 6801.pdf", LatestRevisionDate=22.07.2008, Mounted=Yes, Part Description="DIN 41612, Type R, 96 Position, Rows a+b+c, Performance level 2, Right Angle Female Connector, Lead 3.0 mm, Pitch 2.54mm", Part Number="HARTING_09 73 296 6801", Pin Count=98, PressFit=No, Sense=No, SMD=No, Socket=No, Status=None
J2 J3: "24V /3. 5A, 2.1mm Diameter Pin, SMD DC Power Supply Connector With  Break Contact", Manufacturer=SWITCHCRAFT, Manufacturer Part Number=712RA, Part Number=SWITCHCRAFT_712RA, Author=GK, ClassName=Connectors, ComponentHeight=11mm, Component Type=Standard, CreateDate=15.02.2011, Family=Jack, HelpURL=\\cern.ch\dfs\Applications\Altium\Datasheets\LUMBERG_161314.pdf, LatestRevisionDate=20.07.2011, Mounted=Yes, Part Description="12V/5A, 2.5mm Diameter Pin, THT DC Power Supply Connector With  Break Contact", Pin Count=3, PressFit=No, Sense=No, SMD=No, Socket=No, Status=None
J4 J5 J6 J7: library part 3M_N2530-6002RB, "Connector 30 Male", Manufacturer=3M, Manufacturer Part Number=N2530-6002RB, Author="CERN DEM JLC", ComponentHeight=10.03mm, Component Type=Standard, CreateDate=11.02.2009, Family="Header 30", HelpURL=\\cern.ch\dfs\Applications\Altium\Datasheets\3M_N2530-6002RB.pdf, LatestRevisionDate=11.08.2009, Mounted=Yes, Part Description="30 Contacts - Straight .100'' x .100'' Low Profile Four-Wall Header, 2500 Series", Part Number=3M_N2530-6002RB, Pin Count=30, PressFit=No, Sense=No, SMD=No, Socket=No, Status=None
J8: library part SAMTEC_MMCX-J-P-H-ST-TH1, Manufacturer=SAMTEC, Author="CERN DEM JLC", ComponentHeight=4.35mm, Component Type=Standard, CreateDate=05.12.2012, HelpURL=\\cern.ch\dfs\Applications\Altium\Datasheets\SAMTEC_MMCX-J-P-H-ST-TH1.pdf, LatestRevisionDate=05.12.2012, Manufacturer Part Number=MMCX-J-P-H-ST-TH1, Mounted=Yes, Part Description="Straight Through-hole 50 Ohm Micro Mini RF Jack, MMCX Series", Part Number=SAMTEC_MMCX-J-P-H-ST-TH1, Pin Count=2, PressFit=No, Sense=No, SMD=No, Socket=No, Status=None
R1: library part R0402_100R_1%_0.0625W_100PPM, "Resistor - 1%", Case=0402, Manufacturer=GENERIC, Manufacturer1 ComponentHeight=0.4mm, Manufacturer1 Example="YAGEO PHYCOMP", Manufacturer1 Part Number=232270671001L, Power=0.0625W, Tolerance=±1%, Author="CERN DEM JLC", Component Type=Standard, CreateDate=03.12.2007, HelpURL=\\cern.ch\dfs\Applications\Altium\Datasheets\R0402_Phycomp_RC0402.pdf, LatestRevisionDate=17.10.2012, Manufacturer Part Number=R0402_100R_1%_0.0625W_100PPM, Mounted=Yes, Part Description="General Purpose Thick Film Chip Resistor", Part Number=R0402_100R_1%_0.0625W_100PPM, Pin Count=2, PressFit=No, Sense=No, SMD=Yes, Socket=No, Status="Not Recommended", TC=±100ppm/°C
R2: library part R0402_100K_1%_0.0625W_100PPM, "Resistor - 1%", Case=0402, Manufacturer=GENERIC, Manufacturer1 ComponentHeight=0.4mm, Manufacturer1 Example="YAGEO PHYCOMP", Manufacturer1 Part Number=232270671004L, Power=0.0625W, Tolerance=±1%, Author="CERN DEM JLC", Component Type=Standard, CreateDate=03.12.2007, HelpURL=\\cern.ch\dfs\Applications\Altium\Datasheets\R0402_Phycomp_RC0402.pdf, LatestRevisionDate=17.10.2012, Manufacturer Part Number=R0402_100K_1%_0.0625W_100PPM, Mounted=Yes, Part Description="General Purpose Thick Film Chip Resistor", Part Number=R0402_100K_1%_0.0625W_100PPM, Pin Count=2, PressFit=No, Sense=No, SMD=Yes, Socket=No, Status="Not Recommended", TC=±100ppm/°C
TR1: library part XFMR_MINI-CIRCUITS_TC2-1TX+, "50 Ohm 3 to 300MHz RF Transformers", Manufacturer=MINI-CIRCUITS, HelpURL=https://ww2.minicircuits.com/pdfs/TC2-1TX+.pdf, Manufacturer Part Number=TC2-1TX+

## Via types
v1: diameter 31.5, hole 19.68, TopLayer to BottomLayer, tented both sides, 37 vias
v2: diameter 19.68, hole 7.87, TopLayer to BottomLayer, tented both sides, 5 vias

## Nets (pads, with @x,y where several pads share a name; then routed paths per layer and width w, separated by ;. In a path a pad name is that pad's centre, name@x,y a point inside that pad or via, vN(x,y) a via of type N, cw(c..) or ccw(c..) an arc to the next point about the centre after c; other vN are vias at no path point)
CLK_EXT_N: C3.1 J1.b30 R1.1 TR1.1 | length 1931.3
  TopLayer w5: J1.b30@340.16,3317.32 362.84,3317.32 385.16,3295 385.16,3290.86 408.01,3268.01 412.02,3264 497.14,3264 616,3382.86 616,3595 702,3681 1418,3681 1507,3592 1507,3484.86 1544.1,3447.76 1619.63,3447.76 1633.72,3433.66 C3.1@1649.61,3433.66 1663.7,3447.76 1679.41,3447.76 R1.1@1692.91,3434.25 1696.87,3430.29 1713.71,3430.29 1741.24,3402.75 TR1.1@1760.24,3402.75
CLK_EXT_P: C2.2 J1.c30 R1.2 TR1.3 | length 1914.7
  TopLayer w5: J1.c30@440.16,3317.32 417.48,3317.32 395.16,3295 416.16,3274 493,3274 606,3387 606,3599.14 697.86,3691 1422.14,3691 1517,3596.14 1517,3489 1548.24,3457.76 1619.63,3457.76 1633.72,3471.85 C2.2@1649.61,3471.85 1663.7,3457.76 1679.41,3457.76 R1.2@1692.91,3471.26 1696.87,3475.22 1716.22,3475.22 1743.76,3502.75 TR1.3@1760.24,3502.75
EXT8.LVDS_0_N: J1.a27 J4.3 | length 994.5
  TopLayer w5: J1.a27@240.16,3017.32 285.16,3062.32 362.89,3062.32 395.19,3094.63 395.19,3135.95 421.6,3162.36 483.5,3162.36 693,3371.86 693,3484 747,3538 864.56,3538 868.11,3534.45 868.11,3531.5 J4.3@828.15,3491.54
EXT8.LVDS_0_P: J1.a28 J4.2 | length 994.5
  TopLayer w5: J1.a28@240.16,3117.32 285.16,3072.32 358.75,3072.32 385.19,3098.77 385.19,3140.09 417.46,3172.36 479.36,3172.36 683,3376 683,3488.14 742.86,3548 867.49,3548 J4.2@911.02,3591.54
EXT8.LVDS_1_N: J1.b27 J4.6 | length 1010.2
  BottomLayer w5: J1.b27@340.16,3017.32 385.16,3062.32 510.14,3062.32 516.91,3069.09 ccw(c501,3085) 523.5,3085 ccw(c501,3085) 516.91,3100.91 514.7,3103.12 cw(c523.54,3111.96) 514.7,3120.8 cw(c523.54,3111.96) 532.38,3120.8 561.55,3091.63 ccw(c577.46,3107.54) 593.37,3091.63 ccw(c577.46,3107.54) 599.96,3107.54 ccw(c577.46,3107.54) 593.38,3123.44 564.19,3152.62 cw(c573.03,3161.46) 564.19,3170.3 cw(c573.03,3161.46) 581.87,3170.3 611.06,3141.11 ccw(c626.96,3157.03) 642.87,3141.12 ccw(c626.96,3157.03) 649.46,3157.03 ccw(c626.96,3157.03) 642.88,3172.93 640.65,3175.16 cw(c649.49,3183.99) 640.65,3192.83 669,3221.18 669,3235 672.84,3238.84 ccw(c656.93,3254.75) 679.43,3254.75 ccw(c656.93,3254.75) 672.84,3270.66 670.63,3272.87 cw(c679.47,3281.71) 670.63,3290.55 cw(c679.47,3281.71) 688.3,3290.55 690.52,3288.34 ccw(c706.43,3304.25) 722.34,3288.34 768.49,3334.49 793.17,3334.49 793.21,3334.53 828.83,3334.53 828.88,3334.49 849.51,3334.49 906.56,3391.54 J4.6@911.02,3391.54
EXT8.LVDS_1_P: J1.b28 J4.5 | length 987.7
  BottomLayer w5: J1.b28@340.16,3117.32 385.16,3072.32 506,3072.32 509.84,3076.16 ccw(c501,3085) 513.5,3085 ccw(c501,3085) 509.84,3093.84 507.63,3096.05 cw(c523.54,3111.96) 507.63,3127.87 cw(c523.54,3111.96) 539.44,3127.88 568.62,3098.7 ccw(c577.46,3107.54) 586.3,3098.7 ccw(c577.46,3107.54) 589.96,3107.54 ccw(c577.46,3107.54) 586.3,3116.37 557.12,3145.55 cw(c573.03,3161.46) 557.12,3177.37 cw(c573.03,3161.46) 588.93,3177.38 ; 588.94,3177.37 618.12,3148.19 ccw(c626.96,3157.03) 635.79,3148.19 ccw(c626.96,3157.03) 639.46,3157.03 ccw(c626.96,3157.03) 635.79,3165.87 633.58,3168.08 cw(c649.49,3183.99) 633.58,3199.9 659,3225.32 659,3239.14 665.77,3245.91 ccw(c656.93,3254.75) 669.43,3254.75 ccw(c656.93,3254.75) 665.77,3263.59 663.56,3265.8 cw(c679.47,3281.71) 663.56,3297.62 cw(c679.47,3281.71) 695.37,3297.63 697.59,3295.41 ccw(c706.43,3304.25) 715.27,3295.41 764.39,3344.53 844.44,3344.53 ; J4.5@811.02,3391.54 815.49,3391.54 849.57,3357.45 849.57,3349.58 844.49,3344.49
EXT8.LVDS_2_N: J1.c27 J4.9 | length 989.1
  TopLayer w5: J1.c27@440.16,3017.32 485.16,3062.32 549.14,3062.32 555.92,3069.1 ccw(c540,3085) 562.5,3085 ccw(c540,3085) 555.91,3100.91 545.3,3111.52 cw(c554.14,3120.35) 545.3,3129.19 cw(c554.14,3120.35) 562.98,3129.19 608.95,3083.22 ccw(c624.85,3099.14) 640.76,3083.23 ccw(c624.85,3099.14) 647.35,3099.14 ccw(c624.85,3099.14) 640.76,3115.05 594.8,3161.01 cw(c603.64,3169.85) 594.8,3178.69 cw(c603.64,3169.85) 612.48,3178.69 658.44,3132.73 ccw(c674.35,3148.64) 690.26,3132.73 ccw(c674.35,3148.64) 696.85,3148.64 ccw(c674.35,3148.64) 690.27,3164.54 644.3,3210.51 cw(c653.14,3219.35) 644.3,3228.19 cw(c653.14,3219.35) 661.98,3228.19 672.58,3217.58 ccw(c688.49,3233.49) 704.4,3217.58 725.36,3238.54 862.84,3238.54 867.13,3234.25 867.13,3230.32 J4.9@828.35,3191.54
EXT8.LVDS_2_P: J1.c28 J4.8 | length 990.2
  TopLayer w5: J1.c28@440.16,3117.32 485.16,3072.32 545,3072.32 548.84,3076.16 ccw(c540,3085) 552.5,3085 ccw(c540,3085) 548.84,3093.84 538.23,3104.44 cw(c554.14,3120.35) 538.23,3136.26 cw(c554.14,3120.35) 570.04,3136.27 616.01,3090.3 ccw(c624.85,3099.14) 633.69,3090.3 ccw(c624.85,3099.14) 637.35,3099.14 ccw(c624.85,3099.14) 633.69,3107.98 587.72,3153.95 cw(c603.64,3169.85) 587.73,3185.76 cw(c603.64,3169.85) 619.55,3185.76 665.51,3139.8 ccw(c674.35,3148.64) 683.19,3139.8 ccw(c674.35,3148.64) 686.85,3148.64 ccw(c674.35,3148.64) 683.19,3157.48 637.23,3203.44 cw(c653.14,3219.35) 637.23,3235.26 cw(c653.14,3219.35) 669.05,3235.26 679.65,3224.65 ccw(c688.49,3233.49) 697.33,3224.65 721.22,3248.54 868.03,3248.54 J4.8@911.02,3291.54
EXT8.LVDS_3_N: J1.a25 J4.12 | length 1009.5
  TopLayer w5: J1.a25@240.16,2817.32 285.16,2862.32 362.89,2862.32 395.19,2894.63 395.19,2935.95 421.6,2962.36 493.11,2962.36 ccw(c493.11,2984.86) 515.61,2984.86 515.61,2993.18 cw(c528.11,2993.18) 540.61,2993.18 540.61,2941.54 ccw(c563.11,2941.54) 585.61,2941.54 585.61,2993.18 cw(c598.11,2993.18) 610.61,2993.18 610.61,2984.86 ccw(c633.11,2984.86) 633.11,2962.36 700.67,2962.36 772.84,3034.53 855.67,3034.53 911.02,3089.88 J4.12@911.02,3091.54
EXT8.LVDS_3_P: J1.a26 J4.11 | length 989.9
  TopLayer w5: J1.a26@240.16,2917.32 285.16,2872.32 358.75,2872.32 385.19,2898.77 385.19,2940.09 417.46,2972.36 493.11,2972.36 ccw(c493.11,2984.86) 505.61,2984.86 505.61,2993.18 cw(c528.11,2993.18) 550.61,2993.18 550.61,2941.54 ccw(c563.11,2941.54) 575.61,2941.54 575.61,2993.18 cw(c598.11,2993.18) 620.61,2993.18 620.61,2984.86 ccw(c633.11,2984.86) 633.11,2972.36 696.53,2972.36 768.7,3044.53 851.53,3044.53 856.21,3049.21 856.21,3053.91 J4.11@818.59,3091.54
EXT8.LVDS_4_N: J1.b25 J4.15 | length 1004.3
  BottomLayer w5: J1.b25@340.16,2817.32 385.19,2862.36 491.36,2862.36 494,2865 566.74,2937.74 589.57,2937.74 ccw(c589.57,2960.24) 612.07,2960.24 612.07,2980.9 cw(c624.57,2980.9) 637.07,2980.9 637.07,2904.59 ccw(c659.57,2904.59) 682.07,2904.59 682.07,2980.9 cw(c694.57,2980.9) 707.07,2980.9 707.07,2904.59 ccw(c729.57,2904.59) 752.07,2904.59 752.07,2925.24 cw(c764.57,2925.24) 764.57,2937.74 851.1,2937.74 856.3,2932.55 856.3,2926.18 821.65,2891.54 J4.15@811.02,2891.54
EXT8.LVDS_4_P: J1.b26 J4.14 | length 1009
  BottomLayer w5: J1.b26@340.16,2917.32 385.12,2872.36 487.22,2872.36 562.6,2947.74 589.57,2947.74 ccw(c589.57,2960.24) 602.07,2960.24 602.07,2980.9 cw(c624.57,2980.9) 647.07,2980.9 647.07,2904.59 ccw(c659.57,2904.59) 672.07,2904.59 672.07,2980.9 cw(c694.57,2980.9) 717.07,2980.9 717.07,2904.59 ccw(c729.57,2904.59) 742.07,2904.59 742.07,2925.24 cw(c764.57,2925.24) 764.57,2947.74 851.1,2947.74 867.23,2947.74 J4.14@911.02,2991.54
EXT8.LVDS_5_N: J1.c25 J4.18 | length 975.2
  TopLayer w5: J1.c25@440.16,2817.32 485.16,2862.32 520,2862.32 523.85,2858.47 ccw(c539.75,2874.39) 555.66,2858.48 566.27,2869.09 cw(c575.1,2860.25) 583.94,2869.09 cw(c575.1,2860.25) 587.6,2860.25 cw(c575.1,2860.25) 583.94,2851.41 537.97,2805.44 ccw(c553.89,2789.54) 537.98,2773.63 ccw(c553.89,2789.54) 569.8,2773.63 615.76,2819.59 cw(c624.6,2810.75) 633.44,2819.59 cw(c624.6,2810.75) 637.1,2810.75 cw(c624.6,2810.75) 633.44,2801.91 622.83,2791.31 ccw(c638.74,2775.4) 622.82,2759.5 647.79,2734.53 657.36,2734.53 ccw(c657.36,2757.03) 679.86,2757.03 679.86,2772.03 cw(c692.36,2772.03) 704.86,2772.03 704.86,2707.03 ccw(c727.36,2707.03) 749.86,2707.03 749.86,2749.4 cw(c762.36,2749.4) 774.86,2749.4 ccw(c789.73,2749.4) 789.73,2734.53 847.14,2734.53 857.07,2744.46 857.07,2748.1 J4.18@886.14,2777.17
EXT8.LVDS_5_P: J1.c26 J4.17 | length 976
  TopLayer w5: J1.c26@440.16,2917.32 485.16,2872.32 524.14,2872.32 530.91,2865.55 ccw(c539.75,2874.39) 548.59,2865.55 559.19,2876.16 cw(c575.1,2860.25) 591.01,2876.16 cw(c575.1,2860.25) 597.6,2860.25 cw(c575.1,2860.25) 591.02,2844.35 545.05,2798.38 ccw(c553.89,2789.54) 545.05,2780.7 ccw(c553.89,2789.54) 562.73,2780.7 608.69,2826.66 cw(c624.6,2810.75) 640.51,2826.66 cw(c624.6,2810.75) 647.1,2810.75 cw(c624.6,2810.75) 640.52,2794.85 629.9,2784.24 ccw(c638.74,2775.4) 629.9,2766.56 651.93,2744.53 657.36,2744.53 ccw(c657.36,2757.03) 669.86,2757.03 669.86,2772.03 cw(c692.36,2772.03) 714.86,2772.03 714.86,2707.03 ccw(c727.36,2707.03) 739.86,2707.03 739.86,2749.4 cw(c762.36,2749.4) 784.86,2749.4 ccw(c789.73,2749.4) 789.73,2744.53 843,2744.53 847.07,2748.6 847.07,2755.49 J4.17@811.02,2791.54
EXT8.LVDS_6_N: J1.a23 J4.21 | length 993.2
  TopLayer w5: J1.a23@240.16,2617.32 285.19,2662.36 362.93,2662.36 395.19,2694.63 395.19,2735.95 421.53,2762.29 499.57,2762.29 623.32,2638.54 638.54,2638.54 cw(c638.54,2626.04) 651.04,2626.04 651.04,2610.52 ccw(c673.54,2610.52) 696.04,2610.52 696.04,2647.47 cw(c708.54,2647.47) 721.04,2647.47 721.04,2610.52 ccw(c743.54,2610.52) 766.04,2610.52 766.04,2626.04 cw(c778.54,2626.04) 778.54,2638.54 846.7,2638.54 850.82,2634.42 850.82,2629.36 812.99,2591.54 J4.21@811.02,2591.54
EXT8.LVDS_6_P: J1.a24 J4.20 | length 1009
  TopLayer w5: J1.a24@240.16,2717.32 285.12,2672.36 358.78,2672.36 385.19,2698.77 385.19,2740.09 417.39,2772.29 503.71,2772.29 627.46,2648.54 638.54,2648.54 cw(c638.54,2626.04) 661.04,2626.04 661.04,2610.52 ccw(c673.54,2610.52) 686.04,2610.52 686.04,2647.47 cw(c708.54,2647.47) 731.04,2647.47 731.04,2610.52 ccw(c743.54,2610.52) 756.04,2610.52 756.04,2626.04 cw(c778.54,2626.04) 778.54,2648.54 846.7,2648.54 868.03,2648.54 J4.20@911.02,2691.54
EXT8.LVDS_7_N: J1.b23 J4.24 | length 1005
  BottomLayer w5: J1.b23@340.16,2617.32 385.16,2662.32 484.68,2662.32 499.2,2647.8 ccw(c515.1,2663.72) 531,2647.8 548.69,2665.49 cw(c557.53,2656.65) 566.36,2665.49 cw(c557.53,2656.65) 570.03,2656.65 cw(c557.53,2656.65) 566.36,2647.81 506.26,2587.71 ccw(c522.17,2571.8) 506.26,2555.89 ccw(c522.17,2571.8) 538.07,2555.88 598.18,2615.99 cw(c607.02,2607.15) 615.86,2615.99 cw(c607.02,2607.15) 619.52,2607.15 cw(c607.02,2607.15) 615.86,2598.31 598.17,2580.63 ccw(c614.09,2564.73) 598.18,2548.82 709,2438 858.17,2438 911.02,2490.86 J4.24@911.02,2491.54
EXT8.LVDS_7_P: J1.b24 J4.23 | length 996.6
  BottomLayer w5: J1.b24@340.16,2717.32 385.16,2672.32 488.82,2672.32 506.26,2654.88 ccw(c515.1,2663.72) 523.94,2654.88 541.62,2672.56 cw(c557.53,2656.65) 573.44,2672.56 cw(c557.53,2656.65) 580.03,2656.65 cw(c557.53,2656.65) 573.44,2640.74 513.33,2580.64 ccw(c522.17,2571.8) 513.33,2562.96 ccw(c522.17,2571.8) 531.01,2562.96 591.12,2623.07 cw(c607.02,2607.15) 622.93,2623.06 cw(c607.02,2607.15) 629.52,2607.15 cw(c607.02,2607.15) 622.93,2591.24 605.25,2573.56 ccw(c614.09,2564.73) 605.25,2555.89 713.14,2448 854.02,2448 857.93,2451.91 857.93,2456.05 822.44,2491.54 J4.23@811.02,2491.54
EXT9.LVDS_0_N: J1.a20 J5.3 | length 2536.7
  TopLayer w5: J1.a20@240.16,2317.32 285.16,2362.32 362.89,2362.32 395.19,2394.63 395.19,2435.95 421.53,2462.29 495.71,2462.29 713,2245 719.46,2238.54 965.68,2238.54 987,2259.86 987,3367 1153.42,3533.42 1346.5,3533.42 1351.45,3528.48 1351.45,3519.75 1318.11,3486.42 J5.3@1312.4,3486.42
EXT9.LVDS_0_P: J1.a21 J5.2 | length 2551.9
  TopLayer w5: J1.a21@240.16,2417.32 285.16,2372.32 358.75,2372.32 385.19,2398.77 385.19,2440.09 417.39,2472.29 499.86,2472.29 723.6,2248.54 961.54,2248.54 977,2264 977,3371.14 1149.28,3543.42 1369.41,3543.42 J5.2@1412.4,3586.42
EXT9.LVDS_1_N: J1.b20 J5.6 | length 2551.9
  BottomLayer w5: J1.b20@340.16,2317.32 385.16,2362.32 629,2362.32 655.32,2336 959.14,2336 1032.07,2408.93 1035,2411.86 1035,2598.43 ccw(c1012.5,2598.43) 1012.5,2620.93 989.21,2620.93 cw(c989.21,2633.43) 989.21,2645.93 1012.5,2645.93 ccw(c1012.5,2668.43) 1035,2668.43 1035,2699.35 cw(c1047.5,2699.35) 1047.5,2711.85 1069.87,2711.85 ccw(c1069.87,2734.35) 1092.37,2734.35 ccw(c1069.87,2734.35) 1069.87,2756.85 989.21,2756.85 cw(c989.21,2769.35) 989.21,2781.85 1069.87,2781.85 ccw(c1069.87,2804.35) 1092.37,2804.35 ccw(c1069.87,2804.35) 1069.87,2826.85 989.21,2826.85 cw(c989.21,2839.35) 989.21,2851.85 1070.79,2851.85 ccw(c1070.79,2874.35) 1093.29,2874.35 ccw(c1070.79,2874.35) 1070.79,2896.85 1047.5,2896.85 cw(c1047.5,2909.35) 1035,2909.35 1035,3161.86 1202.56,3329.41 1355.4,3329.41 J5.6@1412.4,3386.42
EXT9.LVDS_1_P: J1.b21 J5.5 | length 2534.8
  BottomLayer w5: J1.b21@340.16,2417.32 385.16,2372.32 633.14,2372.32 659.46,2346 955,2346 1025,2416 1025,2598.43 ccw(c1012.5,2598.43) 1012.5,2610.93 989.21,2610.93 cw(c989.21,2633.43) 989.21,2655.93 1012.5,2655.93 ccw(c1012.5,2668.43) 1025,2668.43 1025,2699.35 cw(c1047.5,2699.35) 1047.5,2721.85 1069.87,2721.85 ccw(c1069.87,2734.35) 1082.37,2734.35 ccw(c1069.87,2734.35) 1069.87,2746.85 989.21,2746.85 cw(c989.21,2769.35) 989.21,2791.85 1069.87,2791.85 ccw(c1069.87,2804.35) 1082.37,2804.35 ccw(c1069.87,2804.35) 1069.87,2816.85 989.21,2816.85 cw(c989.21,2839.35) 989.21,2861.85 1070.79,2861.85 ccw(c1070.79,2874.35) 1083.29,2874.35 ccw(c1070.79,2874.35) 1070.79,2886.85 1047.5,2886.85 cw(c1047.5,2909.35) 1025,2909.35 1025,3166 1198.41,3339.41 1350.81,3339.41 1355.31,3343.92 1355.31,3348.43 J5.5@1317.32,3386.42 ; J5.5@1312.4,3386.42 J5.5@1314.86,3383.96
EXT9.LVDS_2_N: J1.c20 J5.9 | length 2543.9
  TopLayer w5: J1.c20@440.16,2317.32 485.16,2362.32 497,2362.32 522.18,2337.14 ccw(c538.09,2353.05) 554,2337.14 561.31,2344.45 cw(c570.14,2335.61) 578.98,2344.45 cw(c570.14,2335.61) 582.64,2335.61 cw(c570.14,2335.61) 578.98,2326.77 532.45,2280.24 ccw(c548.36,2264.33) 532.45,2248.42 ccw(c548.36,2264.33) 564.26,2248.41 610.8,2294.95 cw(c619.64,2286.11) 628.48,2294.95 cw(c619.64,2286.11) 632.14,2286.11 cw(c619.64,2286.11) 628.48,2277.27 581.94,2230.73 ccw(c597.86,2214.83) 581.95,2198.92 ccw(c597.86,2214.83) 613.76,2198.91 660.3,2245.45 cw(c669.14,2236.61) 677.98,2245.45 cw(c669.14,2236.61) 681.64,2236.61 cw(c669.14,2236.61) 677.98,2227.77 631.44,2181.23 ccw(c647.36,2165.33) 631.45,2149.42 ccw(c647.36,2165.33) 663.27,2149.42 677.74,2163.9 cw(c686.58,2155.06) 695.42,2163.9 726.32,2133 971.14,2133 1050,2211.86 1050,3053 1230,3233 1352.63,3233 1356.3,3229.33 1356.3,3224.41 1318.31,3186.42 J5.9@1312.4,3186.42
EXT9.LVDS_2_P: J1.c21 J5.8 | length 2552
  TopLayer w5: J1.c21@440.16,2417.32 485.16,2372.32 501.14,2372.32 529.25,2344.21 ccw(c538.09,2353.05) 546.93,2344.21 554.23,2351.52 cw(c570.14,2335.61) 586.05,2351.52 cw(c570.14,2335.61) 592.64,2335.61 cw(c570.14,2335.61) 586.06,2319.71 539.52,2273.17 ccw(c548.36,2264.33) 539.52,2255.49 ccw(c548.36,2264.33) 557.2,2255.49 603.73,2302.02 ; 603.74,2302.03 cw(c619.64,2286.11) 635.55,2302.02 cw(c619.64,2286.11) 642.14,2286.11 cw(c619.64,2286.11) 635.56,2270.21 589.02,2223.67 ccw(c597.86,2214.83) 589.02,2205.99 ccw(c597.86,2214.83) 606.7,2205.99 653.23,2252.52 ; 653.24,2252.53 cw(c669.14,2236.61) 685.05,2252.52 cw(c669.14,2236.61) 691.64,2236.61 cw(c669.14,2236.61) 685.06,2220.71 638.52,2174.17 ccw(c647.36,2165.33) 638.52,2156.49 ccw(c647.36,2165.33) 656.2,2156.49 670.67,2170.97 cw(c686.58,2155.06) 702.49,2170.97 730.46,2143 967,2143 1040,2216 1040,3057.14 1225.86,3243 1368.98,3243 J5.8@1412.4,3286.42
EXT9.LVDS_3_N: J1.a18 J5.12 | length 2553.1
  TopLayer w5: J1.a18@240.16,2117.32 285.16,2162.32 362.89,2162.32 395.19,2194.63 395.19,2235.95 421.53,2262.29 477.71,2262.29 684,2056 752.5,2056 ccw(c752.5,2061) 757.5,2061 757.5,2082.02 782.5,2082.02 782.5,2061 ccw(c787.5,2061) 787.5,2056 1008.14,2056 1118,2165.86 1118,2598.5 1143,2598.5 ccw(c1143,2603.5) 1148,2603.5 1148,2638.5 ccw(c1143,2638.5) 1143,2643.5 1088,2643.5 1088,2668.5 1143,2668.5 ccw(c1143,2673.5) 1148,2673.5 1148,2708.5 ccw(c1143,2708.5) 1143,2713.5 1088,2713.5 1088,2738.5 1143,2738.5 ccw(c1143,2743.5) 1148,2743.5 1148,2778.5 ccw(c1143,2778.5) 1143,2783.5 1118,2783.5 1118,2929 1218.41,3029.41 1354.96,3029.41 1363.72,3038.18 1363.72,3042.32 1407.82,3086.42 J5.12@1412.4,3086.42
EXT9.LVDS_3_P: J1.a19 J5.11 | length 2533.5
  TopLayer w5: J1.a19@240.16,2217.32 285.16,2172.32 358.75,2172.32 385.19,2198.77 385.19,2240.09 417.39,2272.29 481.86,2272.29 688.14,2066 747.5,2066 747.5,2087.02 cw(c752.5,2087.02) 752.5,2092.02 787.5,2092.02 cw(c787.5,2087.02) 792.5,2087.02 792.5,2066 1004,2066 1108,2170 1108,2603.5 cw(c1113,2603.5) 1113,2608.5 1138,2608.5 1138,2633.5 1083,2633.5 cw(c1083,2638.5) 1078,2638.5 1078,2673.5 cw(c1083,2673.5) 1083,2678.5 1138,2678.5 1138,2703.5 1083,2703.5 cw(c1083,2708.5) 1078,2708.5 1078,2743.5 cw(c1083,2743.5) 1083,2748.5 1138,2748.5 1138,2773.5 1113,2773.5 cw(c1113,2778.5) 1108,2778.5 1108,2933.14 1208.93,3034.07 1214.27,3039.41 1350.82,3039.41 1353.72,3042.32 1353.72,3049.68 1316.98,3086.42 J5.11@1312.4,3086.42
EXT9.LVDS_4_N: J1.b18 J5.15 | length 2525.5
  BottomLayer w5: J1.b18@340.16,2117.32 385.16,2162.32 503.14,2162.32 576.82,2236 989.14,2236 1007.98,2254.84 ccw(c992.06,2270.74) 1014.56,2270.74 ccw(c992.06,2270.74) 1007.98,2286.64 ; 1007.97,2286.65 990.29,2304.32 cw(c999.13,2313.16) 990.29,2322 cw(c999.13,2313.16) 1007.97,2322 1050.96,2279.01 ccw(c1066.86,2294.93) 1082.77,2279.02 ccw(c1066.86,2294.93) 1089.36,2294.93 ccw(c1066.86,2294.93) 1082.77,2310.84 1039.79,2353.82 cw(c1048.63,2362.66) 1039.79,2371.5 cw(c1048.63,2362.66) 1057.47,2371.5 1075.15,2353.81 ccw(c1091.05,2369.73) 1106.96,2353.82 1114,2360.86 1114,2387.8 ccw(c1091.5,2387.8) 1091.5,2410.3 1067.42,2410.3 cw(c1067.42,2422.8) 1067.42,2435.3 1134.56,2435.3 ccw(c1134.56,2457.8) 1157.06,2457.8 ccw(c1134.56,2457.8) 1134.56,2480.3 1067.42,2480.3 cw(c1067.42,2492.8) 1067.42,2505.3 1151.5,2505.3 ccw(c1151.5,2527.8) 1174,2527.8 ccw(c1151.5,2527.8) 1151.5,2550.3 1067.42,2550.3 cw(c1067.42,2562.8) 1067.42,2575.3 1151.5,2575.3 ccw(c1151.5,2597.8) 1174,2597.8 ccw(c1151.5,2597.8) 1151.5,2620.3 1126.5,2620.3 cw(c1126.5,2632.8) 1114,2632.8 1114,2837 1210.42,2933.42 1349.06,2933.42 1355.31,2927.17 1355.31,2920.28 1321.46,2886.42 J5.15@1312.4,2886.42
EXT9.LVDS_4_P: J1.b19 J5.14 | length 2534
  BottomLayer w5: J1.b19@340.16,2217.32 385.16,2172.32 499,2172.32 572.68,2246 985,2246 1000.9,2261.9 ccw(c992.06,2270.74) 1004.56,2270.74 ccw(c992.06,2270.74) 1000.9,2279.58 983.22,2297.25 cw(c999.13,2313.16) 983.22,2329.07 cw(c999.13,2313.16) 1015.04,2329.07 1058.02,2286.09 ccw(c1066.86,2294.93) 1075.7,2286.09 ccw(c1066.86,2294.93) 1079.36,2294.93 ccw(c1066.86,2294.93) 1075.7,2303.77 1032.71,2346.76 cw(c1048.63,2362.66) 1032.72,2378.57 cw(c1048.63,2362.66) 1064.54,2378.57 1082.21,2360.89 ccw(c1091.05,2369.73) 1099.89,2360.89 1104,2365 1104,2387.8 ccw(c1091.5,2387.8) 1091.5,2400.3 1067.42,2400.3 cw(c1067.42,2422.8) 1067.42,2445.3 1134.56,2445.3 ccw(c1134.56,2457.8) 1147.06,2457.8 ccw(c1134.56,2457.8) 1134.56,2470.3 1067.42,2470.3 cw(c1067.42,2492.8) 1067.42,2515.3 1151.5,2515.3 ccw(c1151.5,2527.8) 1164,2527.8 ccw(c1151.5,2527.8) 1151.5,2540.3 1067.42,2540.3 cw(c1067.42,2562.8) 1067.42,2585.3 1151.5,2585.3 ccw(c1151.5,2597.8) 1164,2597.8 ccw(c1151.5,2597.8) 1151.5,2610.3 1126.5,2610.3 cw(c1126.5,2632.8) 1104,2632.8 1104,2841.14 1206.28,2943.42 1369.41,2943.42 J5.14@1412.4,2986.42
EXT9.LVDS_5_N: J1.c18 J5.18 | length 2514.2
  TopLayer w5: J1.c18@440.16,2117.32 485.16,2162.32 499.54,2162.32 546.78,2115.07 564.46,2097.4 571.53,2090.32 589.21,2072.65 671.86,1990 707.5,1990 ccw(c707.5,1995) 712.5,1995 712.5,2020 737.5,2020 737.5,1995 ccw(c742.5,1995) 742.5,1990 777.5,1990 ccw(c777.5,1995) 782.5,1995 782.5,2020 807.5,2020 807.5,1995 ccw(c812.5,1995) 812.5,1990 847.5,1990 ccw(c847.5,1995) 852.5,1995 852.5,2020 877.5,2020 877.5,1995 ccw(c882.5,1995) 882.5,1990 917.5,1990 ccw(c917.5,1995) 922.5,1995 922.5,2020 947.5,2020 947.5,1995 ccw(c952.5,1995) 952.5,1990 1061.14,1990 1189,2117.86 1189,2251.5 ccw(c1184,2251.5) 1184,2256.5 1159,2256.5 1159,2281.5 1214,2281.5 ccw(c1214,2286.5) 1219,2286.5 1219,2321.5 ccw(c1214,2321.5) 1214,2326.5 1159,2326.5 1159,2351.5 1214,2351.5 ccw(c1214,2356.5) 1219,2356.5 1219,2391.5 ccw(c1214,2391.5) 1214,2396.5 1159,2396.5 1159,2421.5 1214,2421.5 ccw(c1214,2426.5) 1219,2426.5 1219,2461.5 ccw(c1214,2461.5) 1214,2466.5 1159,2466.5 1159,2491.5 1214,2491.5 ccw(c1214,2496.5) 1219,2496.5 1219,2531.5 ccw(c1214,2531.5) 1214,2536.5 1159,2536.5 1159,2561.5 1214,2561.5 ccw(c1214,2566.5) 1219,2566.5 1219,2601.5 ccw(c1214,2601.5) 1214,2606.5 1189,2606.5 1189,2669 1249.41,2729.41 1355.4,2729.41 J5.18@1412.4,2786.42
EXT9.LVDS_5_P: J1.c19 J5.17 | length 2510.6
  TopLayer w5: J1.c19@440.16,2217.32 485.16,2172.32 503.14,2172.32 ; J5.17@1319.88,2786.42 1356.3,2750 1356.3,2744.46 1351.26,2739.41 1245.27,2739.41 1179,2673.14 1179,2601.5 ccw(c1184,2601.5) 1184,2596.5 1209,2596.5 1209,2571.5 1154,2571.5 ccw(c1154,2566.5) 1149,2566.5 1149,2531.5 ccw(c1154,2531.5) 1154,2526.5 1209,2526.5 1209,2501.5 1154,2501.5 ccw(c1154,2496.5) 1149,2496.5 1149,2461.5 ccw(c1154,2461.5) 1154,2456.5 1209,2456.5 1209,2431.5 1154,2431.5 ccw(c1154,2426.5) 1149,2426.5 1149,2391.5 ccw(c1154,2391.5) 1154,2386.5 1209,2386.5 1209,2361.5 1154,2361.5 ccw(c1154,2356.5) 1149,2356.5 1149,2321.5 ccw(c1154,2321.5) 1154,2316.5 1209,2316.5 1209,2291.5 1154,2291.5 ccw(c1154,2286.5) 1149,2286.5 1149,2251.5 ccw(c1154,2251.5) 1154,2246.5 1179,2246.5 1179,2122 1057,2000 957.5,2000 957.5,2025 ccw(c952.5,2025) 952.5,2030 917.5,2030 ccw(c917.5,2025) 912.5,2025 912.5,2000 887.5,2000 887.5,2025 ccw(c882.5,2025) 882.5,2030 847.5,2030 ccw(c847.5,2025) 842.5,2025 842.5,2000 817.5,2000 817.5,2025 ccw(c812.5,2025) 812.5,2030 777.5,2030 ccw(c777.5,2025) 772.5,2025 772.5,2000 747.5,2000 747.5,2025 ccw(c742.5,2025) 742.5,2030 707.5,2030 ccw(c707.5,2025) 702.5,2025 702.5,2000 676,2000 596.28,2079.72 578.6,2097.4 571.53,2104.47 553.86,2122.14 523,2153 515.36,2160.64 ; 503.14,2172.32 512.93,2162.54 ccw(c521.77,2171.37) 515.36,2160.64 ; 503.14,2172.32 503.68,2172.32 515.36,2160.64
EXT9.LVDS_6_N: J1.a16 J5.21 | length 2529.4
  TopLayer w5: J1.a16@240.16,1917.32 285.16,1962.32 362.89,1962.32 395.12,1994.56 395.12,2035.88 421.53,2062.29 481.71,2062.29 505.43,2038.57 ccw(c508.98,2042.09) 512.52,2038.55 524.86,2050.9 542.54,2033.22 530.21,2020.89 ccw(c533.73,2017.34) 530.19,2013.81 609,1935 732.5,1935 ccw(c732.5,1940) 737.5,1940 737.5,1965 762.5,1965 762.5,1910 ccw(c767.5,1910) 767.5,1905 802.5,1905 ccw(c802.5,1910) 807.5,1910 807.5,1965 832.5,1965 832.5,1910 ccw(c837.5,1910) 837.5,1905 872.5,1905 ccw(c872.5,1910) 877.5,1910 877.5,1965 902.5,1965 902.5,1910 ccw(c907.5,1910) 907.5,1905 942.5,1905 ccw(c942.5,1910) 947.5,1910 947.5,1965 972.5,1965 972.5,1910 ccw(c977.5,1910) 977.5,1905 1012.5,1905 ccw(c1012.5,1910) 1017.5,1910 1017.5,1965 1042.5,1965 1042.5,1910 ccw(c1047.5,1910) 1047.5,1905 1082.5,1905 ccw(c1082.5,1910) 1087.5,1910 1087.5,1935 1133.14,1935 1250,2051.86 1250,2596 1287.42,2633.42 1343.5,2633.42 1348.43,2628.5 1348.43,2622.44 J5.21@1312.4,2586.42
EXT9.LVDS_6_P: J1.a17 J5.20 | length 2552.1